# Allegro board pc051b_toplevel_42.brd
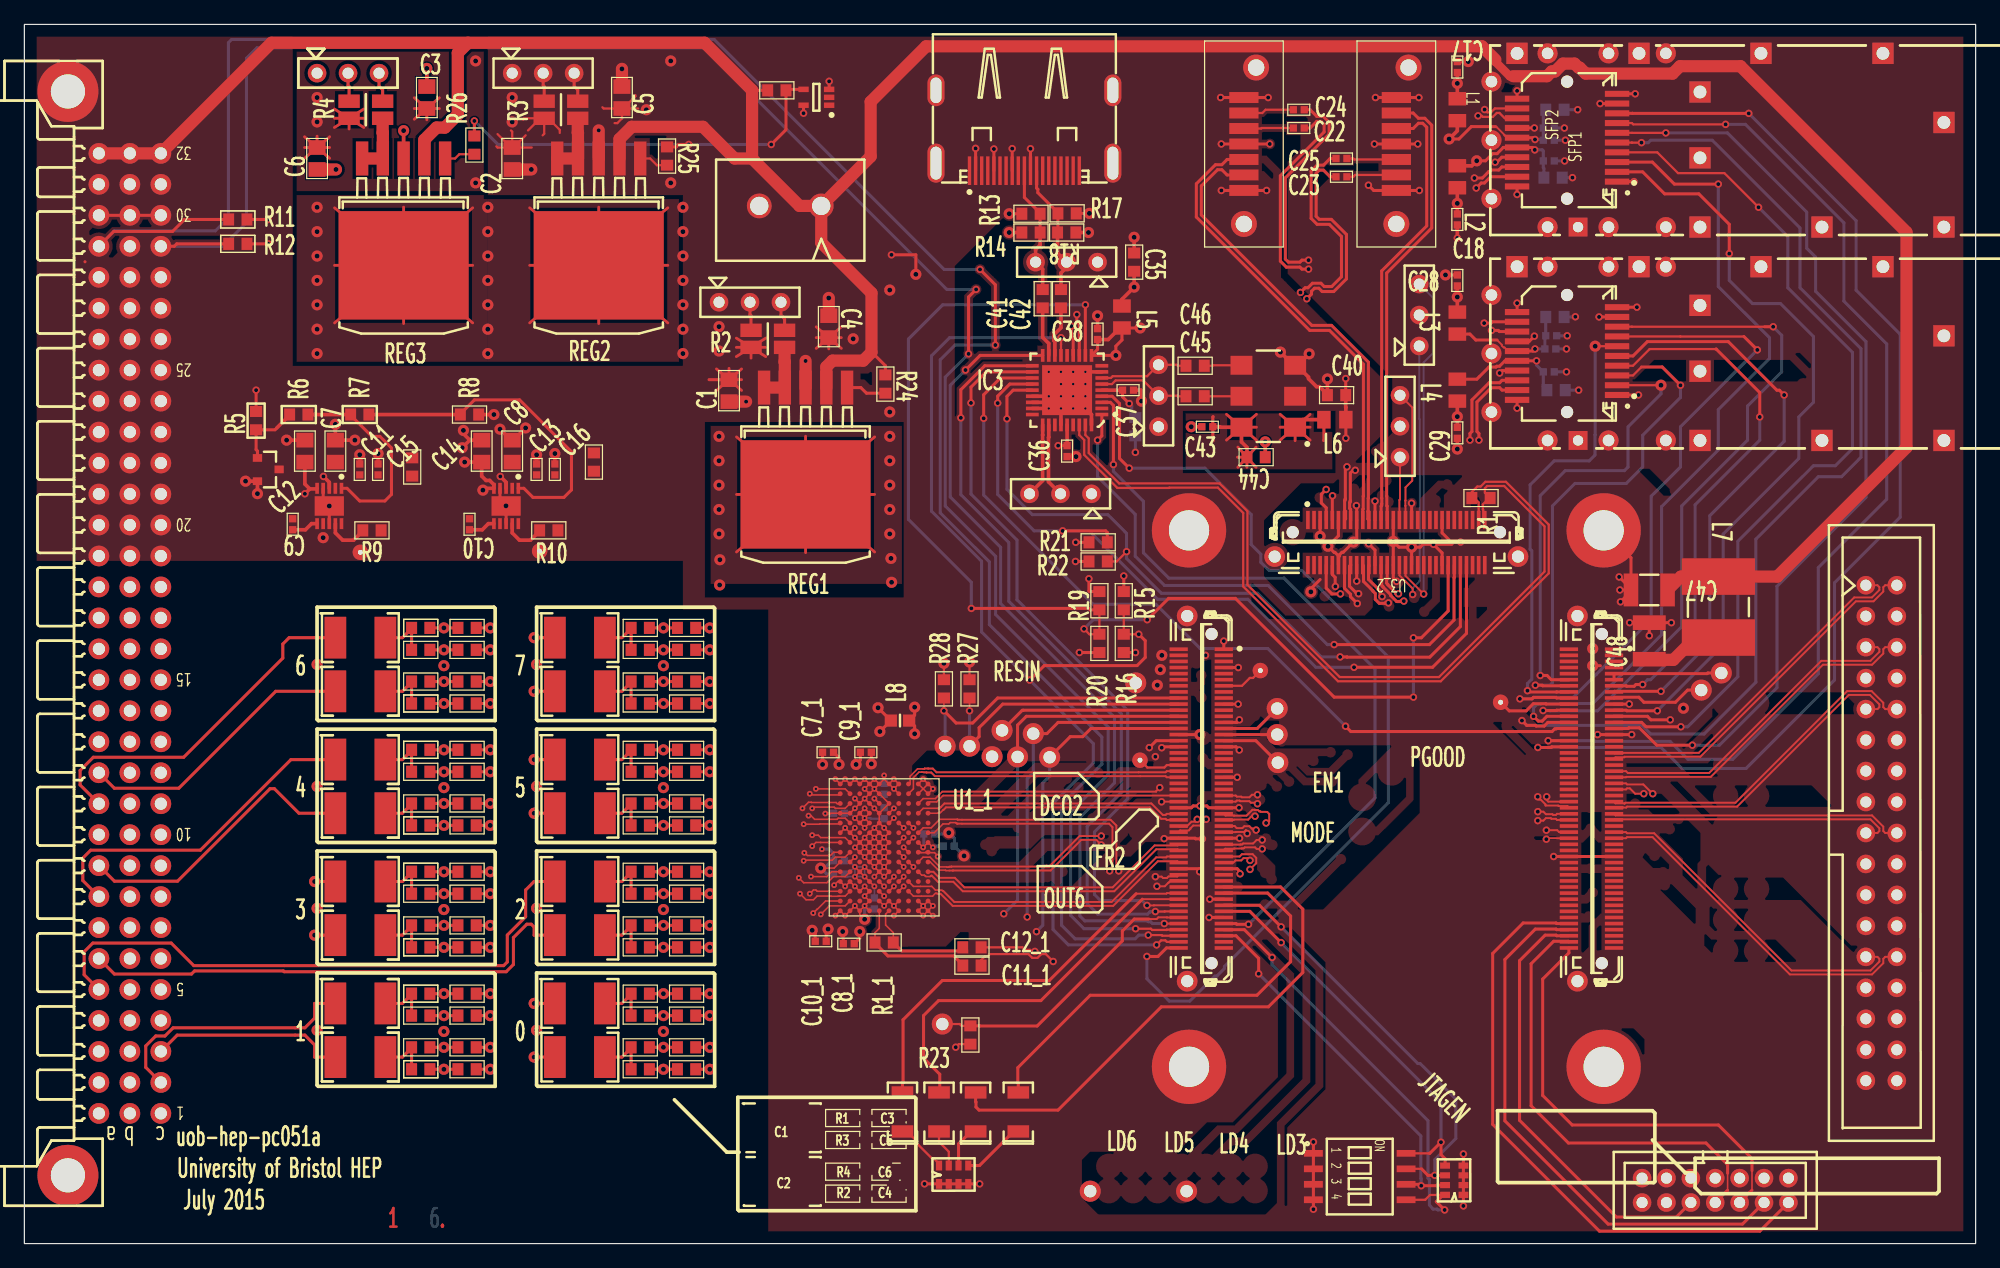
[diagram p0: board, top side]
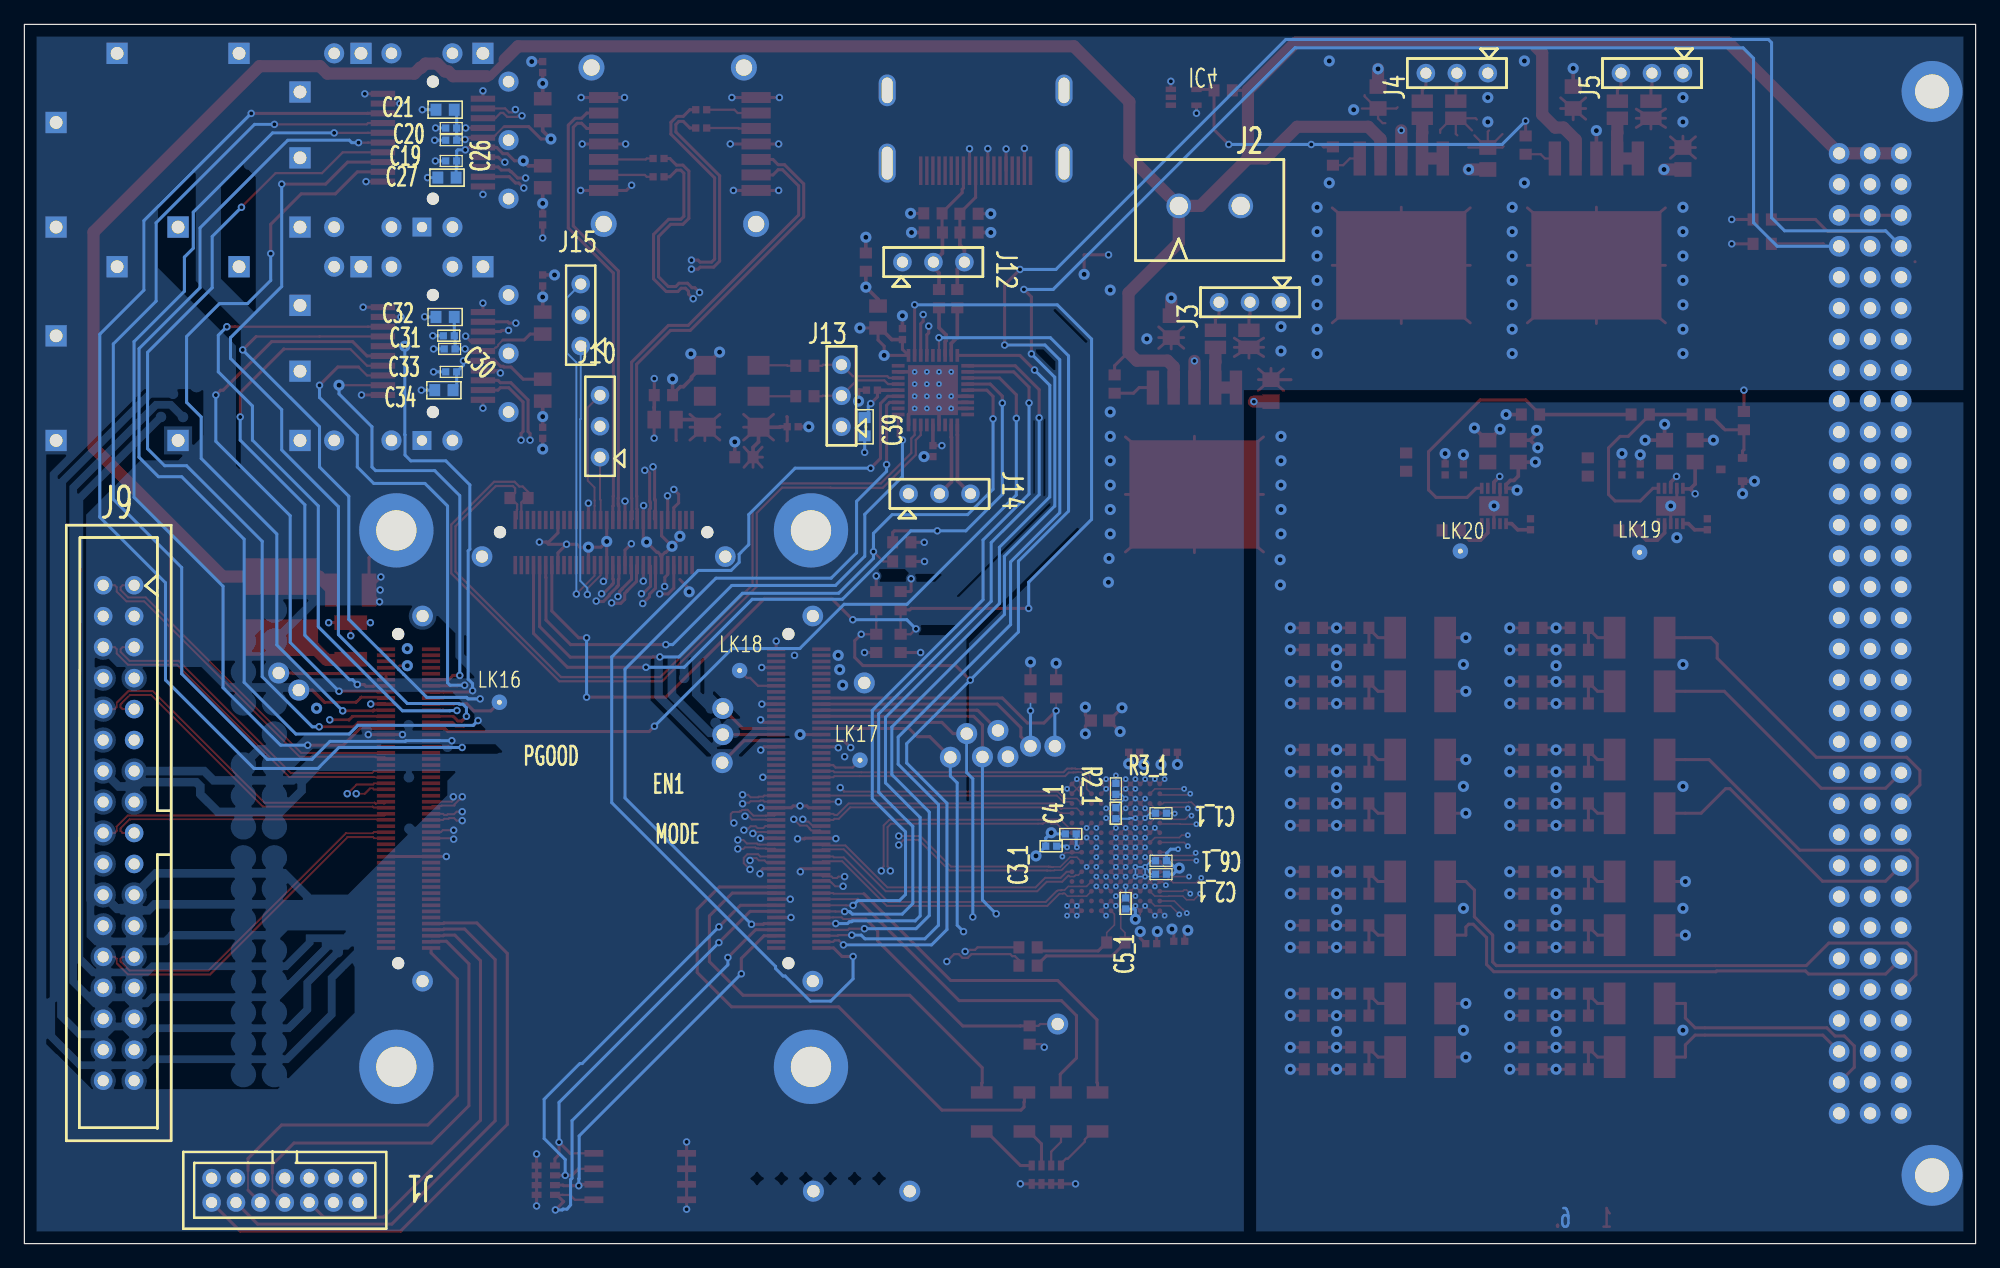
[diagram p1: board, bottom side, seen from below]

Outline 160 x 100 mm; copper layers: TOP, L2, L3, L4, L5, BOTTOM. Coordinates in mm from the lower left corner of the outline.
Outline path: rectangle 0,0 160,100

## Design rules (mm)
net group AIN1>_: nets AIN+<1>_1 AIN-<1>_1
net group AIN2>_: nets AIN+<2>_1 AIN-<2>_1
net group AIN3>_: nets AIN+<3>_1 AIN-<3>_1
net group AIN4>_: nets AIN+<4>_1 AIN-<4>_1
net group AIN5>_: nets AIN+<5>_1 AIN-<5>_1
net group AIN6>_: nets AIN+<6>_1 AIN-<6>_1
net group AIN7>_: nets AIN+<7>_1 AIN-<7>_1
net group AIN8>_: nets AIN+<8>_1 AIN-<8>_1
net group ANA_IN0: nets ANA_IN+<0> ANA_IN-<0>
net group ANA_IN1: nets ANA_IN+<1> ANA_IN-<1>
net group ANA_IN2: nets ANA_IN+<2> ANA_IN-<2>
net group ANA_IN3: nets ANA_IN+<3> ANA_IN-<3>
net group ANA_IN4: nets ANA_IN+<4> ANA_IN-<4>
net group ANA_IN5: nets ANA_IN+<5> ANA_IN-<5>
net group ANA_IN6: nets ANA_IN+<6> ANA_IN-<6>
net group ANA_IN7: nets ANA_IN+<7> ANA_IN-<7>
net group B16: nets B16<1> CLK_40_FROM_FPGA
net group B16_N: nets B16_N<1> CLK_40_FROM_FPGA_N
net group B132: nets B13<2> B13_N<2>
net group B134: nets B13<4> B13_N<4>
net group B151: nets B15<20> B15_N<20>
net group B152: nets B15<2> B15_N<2>
net group B153: nets B15<3> B15_N<3>
net group B155: nets B15<21> B15_N<21>
net group B157: nets B15<7> B15_N<7>
net group B158: nets B15<8> B15_N<8>
net group B159: nets B15<9> B15_N<9>
net group B162: nets B16<2> B16_N<2>
net group B163: nets B16<3> B16_N<3>
net group B164: nets B16<4> B16_N<4>
net group B165: nets B16<5> B16_N<5>
net group B166: nets B16<6> B16_N<6>
net group B167: nets B16<7> B16_N<7>
net group B168: nets B16<8> B16_N<8>
net group B169: nets B16<9> B16_N<9>
net group B1314: nets B13<17> B13_N<17>
net group B1317: nets B13<14> B13_N<14>
net group B1510: nets B15<10> B15_N<10>
net group B1511: nets B15<11> B15_N<11>
net group B1512: nets B15<12> B15_N<12>
net group B1513: nets B15<13> B15_N<13>
net group B1514: nets B15<14> B15_N<14>
net group B1516: nets B15<18> B15_N<18>
net group B1517: nets B15<17> B15_N<17>
net group B1518: nets B15<16> B15_N<16>
net group B1519: nets B15<19> B15_N<19>
net group B1520: nets B15<1> B15_N<1>
net group B1522: nets B15<22> B15_N<22>
net group B1523: nets B15<23> B15_N<23>
net group B1524: nets B15<24> B15_N<24>
net group B1610: nets B16<10> B16_N<10>
net group B1611: nets B16<11> B16_N<11>
net group B1612: nets B16<12> B16_N<12>
net group B1613: nets B16<13> B16_N<13>
net group B1614: nets B16<14> B16_N<14>
net group B1615: nets B16<15> B16_N<15>
net group B1616: nets B16<16> B16_N<16>
net group B1617: nets B16<17> B16_N<17>
net group B1618: nets B16<18> B16_N<18>
net group B1619: nets B16<19> B16_N<19>
net group B1620: nets B16<20> B16_N<20>
net group B1621: nets B16<21> B16_N<21>
net group B1623: nets B16<23> B16_N<23>
net group B1624: nets B16<24> B16_N<24>
net group CLK: nets CLK+_1 CLK-_1
net group CLK40_IN: nets CLK40_IN CLK40_IN_N
net group CLK_40_FPGA: nets CLK_40_FPGA CLK_40_FPGA_N
net group CLKIN: nets CLK40_ADC0 CLK40_ADC0_N
net group MGT_RX0: nets MGT_RX<0> MGT_RX_N<0>
net group MGT_RX1: nets MGT_RX<1> MGT_RX_N<1>
net group MGT_RX2: nets MGT_RX<2> MGT_RX_N<2>
net group MGT_RX3: nets MGT_RX<3> MGT_RX_N<3>
net group MGT_TX0: nets MGT_TX<0> MGT_TX_N<0>
net group MGT_TX1: nets MGT_TX<1> MGT_TX_N<1>
net group MGT_TX2: nets MGT_TX<2> MGT_TX_N<2>
net group MGT_TX3: nets MGT_TX<3> MGT_TX_N<3>
net group B13: nets ADC_CSB ADC_SDI ADC_SDOB B13<1> B13<5> B13<6> B13<10> B13<13> B13<15> B13<16>
net group B13_N: nets ADC_CSA ADC_SCK ADC_SDOA B13_N<1> B13_N<5> B13_N<6> B13_N<10> B13_N<13> B13_N<15> B13_N<16>
net group B14: nets B14<15> CLK40_CLK1_VALID_N CLK40_I2C_SDA CLK40_LOL CLK40_PHASE_DEC CLK40_RATE0 EXTERNAL_SDA SFP0_MOD_DEF1 SFP0_MOD_DEF2 SFP0_RATE_SELECT SFP0_TX_FAULT SFP1_LOS SFP1_MOD_DEF1 SFP1_RATE_SELECT SFP1_TX_DISABLE
net group B14_N: nets B14_N<12> B14_N<15> CLK40_CLK2_VALID_N CLK40_CLK_SEL CLK40_I2C_SCL CLK40_PHASE_INC CLK40_RATE1 CLK40_RST_N EXTERNAL_SCL SFP0_LOS SFP0_MOD_DEF0 SFP0_TX_DISABLE SFP1_MOD_DEF0 SFP1_MOD_DEF2 SFP1_TX_FAULT
net group B15: nets B15<15> BUSY_OUT SYNC_IN TRIG_IN
net group B15_N: nets B15_N<15> BUSY_OUT_N SYNC_IN_N TRIG_IN_N

## Placement (name value [footprint] x y rotation side)
C1  22uF  [C0805]  57.78 69.96 90 top
C1_1  100nF  [C0402]  66.8 35.3 0 bottom
C1_1_1  -  [S45X32]  43.5 49.7 0 top
C1_2_1  -  [S45X32]  43.5 19.7 0 top
C1_3_1  -  [S45X32]  25.5 19.7 0 top
C1_4_1  -  [S45X32]  43.5 29.7 0 top
C1_5_1  -  [S45X32]  25.5 29.7 0 top
C1_6_1  -  [S45X32]  25.5 39.7 0 top
C1_7_1  -  [S45X32]  43.5 39.7 0 top
C1_8_1  -  [S45X32]  25.5 49.7 0 top
C2  22uF  [C0805]  40 89 90 top
C2_1  100nF  [C0402]  66.8 30.3 0 bottom
C2_1_1  -  [S45X32]  43.5 45.3 0 top
C2_2_1  -  [S45X32]  43.5 15.3 0 top
C2_3_1  -  [S45X32]  25.5 15.3 0 top
C2_4_1  -  [S45X32]  43.5 25.3 0 top
C2_5_1  -  [S45X32]  25.5 25.3 0 top
C2_6_1  -  [S45X32]  25.5 35.3 0 top
C2_7_1  -  [S45X32]  43.5 35.3 0 top
C2_8_1  -  [S45X32]  25.5 45.3 0 top
C3  22uF  [C0805]  33 94 270 top
C3_1  100nF  [C0402]  75.8 32.6 180 bottom
C3_1_1  100nF  [C0603]  54.3 50.5 180 top
C3_2_1  100nF  [C0603]  54.3 20.5 180 top
C3_3_1  100nF  [C0603]  36.3 20.5 180 top
C3_4_1  100nF  [C0603]  54.3 30.5 180 top
C3_5_1  100nF  [C0603]  36.3 30.5 180 top
C3_6_1  100nF  [C0603]  36.3 40.5 180 top
C3_7_1  100nF  [C0603]  54.3 40.5 180 top
C3_8_1  100nF  [C0603]  36.3 50.5 180 top
C4  22uF  [C0805]  65.96 75.21 270 top
C4_1  100nF  [C0402]  74.2 33.6 180 bottom
C4_1_1  100nF  [C0603]  54.3 44.3 180 top
C4_2_1  100nF  [C0603]  54.3 14.3 180 top
C4_3_1  100nF  [C0603]  36.3 14.3 180 top
C4_4_1  100nF  [C0603]  54.3 24.3 180 top
C4_5_1  100nF  [C0603]  36.3 24.3 180 top
C4_6_1  100nF  [C0603]  36.3 34.3 180 top
C4_7_1  100nF  [C0603]  54.3 34.3 180 top
C4_8_1  100nF  [C0603]  36.3 44.3 180 top
C5  22uF  [C0805]  49 94 270 top
C5_1  100nF  [C0402]  69.7 27.9 90 bottom
C5_1_1  180pF  [C0603]  54.3 48.7 180 top
C5_2_1  180pF  [C0603]  54.3 18.7 180 top
C5_3_1  180pF  [C0603]  36.3 18.7 180 top
C5_4_1  180pF  [C0603]  54.3 28.7 180 top
C5_5_1  180pF  [C0603]  36.3 28.7 180 top
C5_6_1  180pF  [C0603]  36.3 38.7 180 top
C5_7_1  180pF  [C0603]  54.3 38.7 180 top
C5_8_1  180pF  [C0603]  36.3 48.7 180 top
C6  22uF  [C0805]  24 89 90 top
C6_1  100nF  [C0402]  66.8 31.4 0 bottom
C6_1_1  180pF  [C0603]  54.3 46.1 180 top
C6_2_1  180pF  [C0603]  54.3 16.1 180 top
C6_3_1  180pF  [C0603]  36.3 16.1 180 top
C6_4_1  180pF  [C0603]  54.3 26.1 180 top
C6_5_1  180pF  [C0603]  36.3 26.1 180 top
C6_6_1  180pF  [C0603]  36.3 36.1 180 top
C6_7_1  180pF  [C0603]  54.3 36.1 180 top
C6_8_1  180pF  [C0603]  36.3 46.1 180 top
C7  22uF  [C0805]  25.5 65 270 top
C7_1  100nF  [C0402]  65.9 40.3 0 top
C8  22uF  [C0805]  40 65 270 top
C8_1  100nF  [C0402]  67.6 24.6 0 top
C9  100nF  [C0402]  22 59 270 top
C9_1  100nF  [C0402]  69 40.3 0 top
C10  100nF  [C0402]  36.5 59 270 top
C10_1  100nF  [C0402]  65.3 24.8 0 top
C11  100nF  [C0402]  27.5 63.5 270 top
C11_1  100nF  [C0603]  77.7 22.8 180 top
C12  22uF  [C0805]  23 65 270 top
C12_1  100nF  [C0603]  77.7 24.3 180 top
C13  100nF  [C0402]  42 63.5 270 top
C14  22uF  [C0805]  37.5 65 270 top
C15  1uF  [C0402]  29 63.5 270 top
C16  1uF  [C0402]  43.5 63.5 270 top
C17  1uF  [C0402]  117.5 96.5 270 top
C18  1uF  [C0402]  117.5 84 90 top
C19  100nF  [C0402]  125 90.5 180 bottom
C20  1uF  [C0402]  125 91.5 180 bottom
C21  22uF  [C0603]  125.5 93 180 bottom
C22  100nF  [C0402]  104.5 91.5 0 top
C23  100nF  [C0402]  108 87.5 180 top
C24  100nF  [C0402]  104.5 93 0 top
C25  100nF  [C0402]  108 89 180 top
C26  100nF  [C0402]  125 88.8 180 bottom
C27  22uF  [C0603]  125.35 87.43 180 bottom
C28  1uF  [C0402]  117.5 79 270 top
C29  1uF  [C0402]  117.5 66.5 90 top
C30  100nF  [C0402]  125.13 73.38 180 bottom
C31  1uF  [C0402]  125.2 74.46 180 bottom
C32  22uF  [C0603]  125.5 76 180 bottom
C33  100nF  [C0402]  125 71.5 180 bottom
C34  22uF  [C0603]  125.6 70 180 bottom
C35  10uF  [C0603]  91 80.5 270 top
C36  100nF  [C0402]  85.5 65 90 top
C37  100nF  [C0402]  90.5 70 180 top
C38  100nF  [C0402]  88 74.6 270 top
C39  10uF  [C0603]  91.1 67 90 bottom
C40  10uF  [C0603]  107.6 69.59 0 top
C41  100nF  [C0603]  83.5 77.5 90 top
C42  100nF  [C0603]  85 77.5 90 top
C43  100nF  [C0402]  97 67 0 top
C44  10uF  [C0603]  101 64.5 180 top
C45  100nF  [C0603]  96 69.5 0 top
C46  100nF  [C0603]  96 72 0 top
C47  10uF  [C1210]  133.24 53.61 180 top
C48  10uF  [C1210]  133.24 49.43 90 top
IC1  -  [SON50P300X300X100-11N-R240X160]  25 60.5 270 top
IC2  -  [SON50P300X300X100-11N-R240X160]  39.5 60.5 270 top
IC3  -  [QFN50P600X600X90-37N-S410]  85.5 70 180 top
IC4  -  [SOT65P210X110-5N]  64.94 94.02 180 top
J1  -  [CON14MD_2MM]  144.65 5.37 270 top
J2  -  [COND2M_508]  65.34 85.11 270 top
J3  -  [CONHE13D3X1M]  56.96 77.21 0 top
J4  -  [CONHE13D3X1M]  40 96 0 top
J5  -  [CONHE13D3X1M]  24 96 0 top
J6  -  [HARTING_0903196X921]  6.11 10.68 180 top
J7  -  [TYCO_1367073]  126.5 90.5 180 top
J8  -  [TYCO_1367073]  126.5 73 180 top
J9  -  [CON34MD_3M2500]  151 54 270 top
J10  -  [CONHE13D3X1M]  112.8 64.5 90 top
J11  -  [SAMTEC_HDMI-19-01-X-SM]  82 88 180 top
J12  -  [CONHE13D3X1M]  88 80.5 180 top
J13  -  [CONHE13D3X1M]  93 67 90 top
J14  -  [CONHE13D3X1M]  87.5 61.5 180 top
J15  -  [CONHE13D3X1M]  114.38 73.62 90 top
JB1  -  [SAMTEC_LSHM-150-04-0-L-DV-A-S]  96.45 36.5 90 top
JB2  -  [SAMTEC_LSHM-150-04-0-L-DV-A-S]  128.45 36.5 90 top
JB3  -  [SAMTEC_LSHM-130-04-0-L-DV-A-S]  112.5 57.45 180 top
L1  -  [INDC2012X90N]  117.5 93 270 top
L2  -  [INDC2012X90N]  117.5 87.5 270 top
L3  -  [INDC2012X90N]  117.5 75.5 270 top
L4  -  [INDC2012X90N]  117.5 70 270 top
L5  -  [INDC2012X90N]  90 76 270 top
L6  -  [INDC2012X90N]  107.46 67.58 180 top
L7  -  [INDC_WURTH_7427511]  138.91 52.21 90 top
L8  330R@100MHz  [INDC1608X95N]  71.8 42.9 0 top
L9  -  [C0603]  31.8 63.7 90 top
L10  -  [C0603]  46.7 64.1 90 top
LD3  Red  [D1206]  81.5 12.4 270 top
LD4  Green  [D1206]  78 12.4 270 top
LD5  Yellow  [D1206]  75 12.4 270 top
LD6  Red  [D1206]  72 12.4 270 top
LK1  -  [1-HOLE_1-0P]  102.73 41.75 0 top
LK1_2  -  [FXG_M3]  129.5 14.5 90 top
LK2  -  [1-HOLE_1-0P]  102.73 43.89 0 top
LK2_2  -  [FXG_M3]  129.5 58.5 90 top
LK3  -  [1-HOLE_1-0P]  75.27 18.01 0 top
LK3_2  -  [FXG_M3]  95.5 14.5 90 top
LK4  -  [1-HOLE_1-0P]  102.78 39.45 0 top
LK4_2  -  [FXG_M3]  95.5 58.5 90 top
LK5  -  [1-HOLE_1-0P]  91.13 45.99 0 top
LK6  -  [1-HOLE_1-0P]  137.5 45.4 0 top
LK7  -  [1-HOLE_1-0P]  87.4 4.3 0 top
LK8  -  [1-HOLE_1-0P]  95.3 4.3 0 top
LK9  -  [1-HOLE_1-0P]  139.15 46.8 0 top
LK16  -  [1-HOLE_0-4P]  121.05 44.4 0 top
LK17  -  [1-HOLE_0-4P]  91.48 39.65 0 top
LK18  -  [1-HOLE_0-4P]  101.35 47 0 top
LK19  -  [1-HOLE_0-4P]  27.55 56.7 0 top
LK20  -  [1-HOLE_0-4P]  42.25 56.8 0 top
LK21  -  [1-HOLE_1-0P]  75.5 40.8 0 top
LK22  -  [1-HOLE_1-0P]  81.44 39.92 0 top
LK23  -  [1-HOLE_1-0P]  84.07 39.89 0 top
LK24  -  [1-HOLE_1-0P]  77.5 40.8 0 top
LK25  -  [1-HOLE_1-0P]  80.17 42.09 0 top
LK26  -  [1-HOLE_1-0P]  82.73 41.83 0 top
LK27  -  [1-HOLE_1-0P]  79.35 39.94 0 top
NOREF  -  []  66 26.88 90 top
NOREF#2  -  []  -50.7 -54.1 0 top
NOREF#3  -  []  0 0 90 top
NOREF#4  -  []  66 26.88 90 top
NOREF#5  -  []  74.1 36.9 90 top
NOREF#6  -  []  66 38.12 0 top
NOREF#7  -  []  0 100 0 top
NOREF#8  -  []  66 38.12 0 top
NOREF#9  -  []  74.1 36.9 90 top
QZ1  125MHz  [OSCSC254P520X750X140-6N]  102 69.5 180 top
R1  100  [C0603]  119.44 61.15 180 top
R1_1  100  [C0603]  70.5 24.7 180 top
R1_1_1  51  [C0603]  50.5 50.5 180 top
R1_2_1  51  [C0603]  50.5 20.5 180 top
R1_3_1  51  [C0603]  32.5 20.5 180 top
R1_4_1  51  [C0603]  50.5 30.5 180 top
R1_5_1  51  [C0603]  32.5 30.5 180 top
R1_6_1  51  [C0603]  32.5 40.5 180 top
R1_7_1  51  [C0603]  50.5 40.5 180 top
R1_8_1  51  [C0603]  32.5 50.5 180 top
R2  0.05  [RES_LVK12]  60.96 74.21 180 top
R2_1  0R0  [C0402]  70.5 35.3 270 bottom
R2_1_1  51  [C0603]  50.5 44.3 180 top
R2_2_1  51  [C0603]  50.5 14.3 180 top
R2_3_1  51  [C0603]  32.5 14.3 180 top
R2_4_1  51  [C0603]  50.5 24.3 180 top
R2_5_1  51  [C0603]  32.5 24.3 180 top
R2_6_1  51  [C0603]  32.5 34.3 180 top
R2_7_1  51  [C0603]  50.5 34.3 180 top
R2_8_1  51  [C0603]  32.5 44.3 180 top
R3  0.05  [RES_LVK12]  44 93 180 top
R3_1  XX  [C0402]  70.5 37.3 270 bottom
R3_1_1  100  [C0603]  50.5 48.7 0 top
R3_2_1  100  [C0603]  50.5 18.7 0 top
R3_3_1  100  [C0603]  32.5 18.7 0 top
R3_4_1  100  [C0603]  50.5 28.7 0 top
R3_5_1  100  [C0603]  32.5 28.7 0 top
R3_6_1  100  [C0603]  32.5 38.7 0 top
R3_7_1  100  [C0603]  50.5 38.7 0 top
R3_8_1  100  [C0603]  32.5 48.7 0 top
R4  0.05  [RES_LVK12]  28 93 180 top
R4_1_1  100  [C0603]  50.5 46.1 0 top
R4_2_1  100  [C0603]  50.5 16.1 0 top
R4_3_1  100  [C0603]  32.5 16.1 0 top
R4_4_1  100  [C0603]  50.5 26.1 0 top
R4_5_1  100  [C0603]  32.5 26.1 0 top
R4_6_1  100  [C0603]  32.5 36.1 0 top
R4_7_1  100  [C0603]  50.5 36.1 0 top
R4_8_1  100  [C0603]  32.5 46.1 0 top
R5  220  [C0603]  19 67.5 90 top
R6  68  [C0603]  22.5 68 180 top
R7  390  [C0603]  27.5 68 180 top
R8  510  [C0603]  36.5 68 180 top
R9  150  [C0603]  28.5 58.5 0 top
R10  150  [C0603]  43 58.5 0 top
R11  1k  [C0603]  17.5 84 0 top
R12  1k  [C0603]  17.5 82 0 top
R13  130  [C0603]  82.54 84.47 180 top
R14  82  [C0603]  82.54 82.93 0 top
R15  1k  [C0603]  90.15 52.73 90 top
R16  1k  [C0603]  90.15 49.23 90 top
R17  130  [C0603]  85.5 84.5 0 top
R18  82  [C0603]  85.47 82.93 180 top
R19  1k  [C0603]  88.15 52.73 90 top
R20  1k  [C0603]  88.15 49.23 90 top
R21  1k  [C0603]  88.05 57.52 180 top
R22  1k  [C0603]  88.05 55.95 180 top
R23  1k  [C0603]  77.57 17.11 270 top
R24  00  [C0603]  70.6 70.5 270 top
R25  00  [C0603]  52.7 89.2 270 top
R26  00  [C0603]  36.9 90.1 270 top
R27  1k  [C0603]  77.5 45.5 90 top
R28  1k  [C0603]  75.4 45.5 90 top
R29  1k  [C0603]  61.7 94.59 180 top
REG1  -  [DDPAK_5]  67.46 70.21 180 top
REG2  -  [DDPAK_5]  50.5 89 180 top
REG3  -  [DDPAK_5]  34.5 89 180 top
RZ1  33  [ARC241_SO8]  75 4.9 0 top
RZ2  4.7k  [ARC241_SO8]  118 4 90 top
SFP1  -  [TYCO_6367034-1]  126.5 90.5 180 top
SFP2  -  [TYCO_6367035-1]  126.5 90.5 180 top
SFP3  -  [TYCO_6367034-1]  126.5 73 180 top
SFP4  -  [TYCO_6367035-1]  126.5 73 180 top
SW1  -  [SW_TYCO_1571983-4]  109.5 5.5 0 top
U1  -  [SK_SATA_SMD_STR]  100 94 0 top
U1_1  -  [BGA140_11-25MMX9-00MMX2MM]  70.5 32.5 0 top
U2  -  [SK_SATA_SMD_STR]  112.5 94 0 top
Z1  -  [SOT23]  20 63.5 0 top

## Library data of the parts
C1-C8 C12 C14 = CAPCERSMDCL2: part number: CAPCERSMDCL2_0805-22UF_X7R,10V_GEN; tolerance: 10%
C1_1 C2_1 C3_1 C4_1 C5_1 C6_1 C7_1 C8_1 C9 C9_1 C10 C10_1 C11 C13 C19 C22-C26 C30 C33 C36-C38 C43 = CAPCERSMDCL2: part number: CAPCERSMDCL2_0402-100NF,16V_GEN; tolerance: 10%
C1_1_1 C1_2_1 C1_3_1 C1_4_1 C1_5_1 C1_6_1 C1_7_1 C1_8_1 C2_1_1 C2_2_1 C2_3_1 C2_4_1 C2_5_1 C2_6_1 C2_7_1 C2_8_1 = CAPCERSMDCL1: part number: CAPCERSMDCL1_1812-470NF,50V
C3_1_1 C3_2_1 C3_3_1 C3_4_1 C3_5_1 C3_6_1 C3_7_1 C3_8_1 C4_1_1 C4_2_1 C4_3_1 C4_4_1 C4_5_1 C4_6_1 C4_7_1 C4_8_1 C11_1 C12_1 C41 C42 C45 C46 = CAPCERSMDCL2: part number: CAPCERSMDCL2_0603-100NF,16V; tolerance: 10%
C5_1_1 C5_2_1 C5_3_1 C5_4_1 C5_5_1 C5_6_1 C5_7_1 C5_8_1 C6_1_1 C6_2_1 C6_3_1 C6_4_1 C6_5_1 C6_6_1 C6_7_1 C6_8_1 = CAPCERSMDCL1: part number: CAPCERSMDCL1_0603-180PF,50V; tolerance: 5%
C15-C18 C20 C28 C29 C31 = CAPCERSMDCL2: part number: CAPCERSMDCL2_0402-1UF,16V; tolerance: 10%
C21 C27 C32 C34 = CAPCERSMDCL2: part number: CAPCERSMDCL2_0603-22UF,4V; tolerance: 20%
C35 C39 C40 C44 = CAPCERSMDCL2: part number: CAPCERSMDCL2_0603-10UF,6.3V; tolerance: 20%
C47 C48 = CAPCERSMDCL2: part number: CAPCERSMDCL2_1210-10UF,25V; tolerance: 10%
IC1 IC2 = TPS51200: part number: TPS5200DRCT
IC3 = SI5326: part number: SI5326A-C-GM
IC4 = 74LVC1G07: part number: SN74LVC1G07DCK
J1 = CON14P: part number: CON14P-MOLEX_87831
J2 = CON2P: part number: CON2P-MSTBVA2.5-2
J3-J5 J10 J12-J15 = CON3P: part number: CON3P-SIL254D
J6 = CONABC96: part number: CONABC96-09 03 196 6921
J7 J8 = CON20P_SFP: part number: CON20P_SFP-1367073-1
J9 = CON34P: part number: CON34P-3M_2534_60
J11 = CON19P: part number: CON19P-HDMI-19-01-X-SM
JB1 = TRENZ_TE0712_JB1
JB2 = TRENZ_TE0712_JB2
JB3 = TRENZ_TE0712_JB3
L1-L6 = FERRITE: part number: FERRITE_C0805-LI0805H121R-10,LI0805H121R-10
L7 = FERRITE: part number: FERRITE_SMD-7427511,WURTH
L8 = FERRITE: part number: FERRITE_SMD-MPZ1608S331A,TDK
L9 L10 = FERRITE: part number: FERRITE_SMD-10Z,ILBB_0603
LD3 LD6 = LED: part number: LED-HSMH-C150
LD4 = LED: part number: LED-HSMY-C150
LD5 = LED: part number: LED-HSMG-C150
LK1-LK9 LK21-LK27 = 1-HOLE: part number: 1-HOLE_1-0-BASE
LK1_2 LK2_2 LK3_2 LK4_2 = 1-HOLE: part number: 1-HOLE_M3-BASE
LK16-LK20 = 1-HOLE: part number: 1-HOLE_0-4-BASE
QZ1 = OSC_6P_ENDIS_OUTP_OUTN: part number: FXO-LC725-125
R1 R1_1 R3_1_1 R3_2_1 R3_3_1 R3_4_1 R3_5_1 R3_6_1 R3_7_1 R3_8_1 R4_1_1 R4_2_1 R4_3_1 R4_4_1 R4_5_1 R4_6_1 R4_7_1 R4_8_1 = RSMD0603: part number: RSMD0603_1/10W-100,1%; tolerance: 1%
R1_1_1 R1_2_1 R1_3_1 R1_4_1 R1_5_1 R1_6_1 R1_7_1 R1_8_1 R2_1_1 R2_2_1 R2_3_1 R2_4_1 R2_5_1 R2_6_1 R2_7_1 R2_8_1 = RSMD0603: part number: RSMD0603_1/10W-51,1%; tolerance: 1%
R2-R4 = RES_SR: part number: RES_SR_LVK12-0.05,1%
R2_1 = RSMD0402: part number: RSMD0402_1/16W-0R0,1%; tolerance: 1%
R3_1 = RSMD0402: part number: RSMD0402_0.0625W-XX,1%; tolerance: 1%
R5 = RSMD0603: part number: RSMD0603_1/10W-220,1%; tolerance: 1%
R6 = RSMD0603: part number: RSMD0603_1/10W-68,1%; tolerance: 1%
R7 = RSMD0603: part number: RSMD0603_1/10W-390,1%; tolerance: 1%
R8 = RSMD0603: part number: RSMD0603_1/10W-510,1%; tolerance: 1%
R9 R10 = RSMD0603: part number: RSMD0603_1/10W-150,1%; tolerance: 1%
R11 R12 R15 R16 R19-R23 R27-R29 = RSMD0603: part number: RSMD0603_1/10W-1K,1%; tolerance: 1%
R13 R17 = RSMD0603: part number: RSMD0603_1/10W-130,1%; tolerance: 1%
R14 R18 = RSMD0603: part number: RSMD0603_1/10W-82,1%; tolerance: 1%
R24-R26 = RSMD0603: part number: RSMD0603_-00,
REG1 = LT1963EQ: part number: LT1963EQ-3.3V
REG2 = LT1963EQ: part number: LT1963EQ-2.5V
REG3 = LT1963EQ: part number: LT1963EQ-1.8V
RZ1 = R4ISMD: part number: R4ISMD_1206-33
RZ2 = R4ISMD: part number: R4ISMD_1206-4.7K
SFP1 SFP3 = SFP_CAGE: part number: SFP_CAGE-6367034-1
SFP2 SFP4 = SFP_CAGE: part number: SFP_CAGE-6367035-1
SW1 = SW4INT: part number: SW4INT-1571983-4
U1 U2 = SK_SATA: part number: SK_SATA_SMD_STR-MOLEX
U1_1 = LTM9007_CY: part number: LTM9007_CY_BGA-LINEAR
Z1 = LM4041_1V2

## Footprints (pads in the part's own frame, mm; a bottom-side part is the same pattern mirrored in y, then rotated)
1-HOLE_0-4P
  round 1.27 hole 0.406: 1(0,0)
1-HOLE_1-0P
  round 1.727 hole 1.016: 1(0,0)
ARC241_SO8
  rect 0.508x0.813 smd: 1(0,0) 2(0.8,0) 3(1.6,0) 4(2.4,0) 5(2.4,1.505) 6(1.6,1.505) 7(0.8,1.505) 8(0,1.505)
BGA140_11-25MMX9-00MMX2MM
  round 0.4 smd: A1(-3.6,5.2) A2(-2.8,5.2) A3(-2,5.2) A4(-1.2,5.2) A5(-0.4,5.2) A6(0.4,5.2) A7(1.2,5.2) A8(2,5.2) A9(2.8,5.2) A10(3.6,5.2) B1(-3.6,4.4) B2(-2.8,4.4) B3(-2,4.4) B4(-1.2,4.4) B5(-0.4,4.4) B6(0.4,4.4) B7(1.2,4.4) B8(2,4.4) B9(2.8,4.4) B10(3.6,4.4) C1(-3.6,3.6) C2(-2.8,3.6) C3(-2,3.6) C4(-1.2,3.6) C5(-0.4,3.6) C6(0.4,3.6) C7(1.2,3.6) C8(2,3.6) C9(2.8,3.6) C10(3.6,3.6) D1(-3.6,2.8) D2(-2.8,2.8) D3(-2,2.8) D4(-1.2,2.8) D5(-0.4,2.8) D6(0.4,2.8) D7(1.2,2.8) D8(2,2.8) D9(2.8,2.8) D10(3.6,2.8) E1(-3.6,2) E2(-2.8,2) E3(-2,2) E4(-1.2,2) E5(-0.4,2) E6(0.4,2) E7(1.2,2) E8(2,2) E9(2.8,2) E10(3.6,2) F1(-3.6,1.2) F2(-2.8,1.2) F3(-2,1.2) F4(-1.2,1.2) F5(-0.4,1.2) F6(0.4,1.2) F7(1.2,1.2) F8(2,1.2) F9(2.8,1.2) F10(3.6,1.2) G1(-3.6,0.4) G2(-2.8,0.4) G3(-2,0.4) G4(-1.2,0.4) G5(-0.4,0.4) G6(0.4,0.4) G7(1.2,0.4) G8(2,0.4) G9(2.8,0.4) G10(3.6,0.4) H1(-3.6,-0.4) H2(-2.8,-0.4) H3(-2,-0.4) H4(-1.2,-0.4) H5(-0.4,-0.4) H6(0.4,-0.4) H7(1.2,-0.4) H8(2,-0.4) H9(2.8,-0.4) H10(3.6,-0.4) J1(-3.6,-1.2) J2(-2.8,-1.2) J3(-2,-1.2) J4(-1.2,-1.2) J5(-0.4,-1.2) J6(0.4,-1.2) J7(1.2,-1.2) J8(2,-1.2) J9(2.8,-1.2) J10(3.6,-1.2) K1(-3.6,-2) K2(-2.8,-2) K3(-2,-2) K4(-1.2,-2) K5(-0.4,-2) K6(0.4,-2) K7(1.2,-2) K8(2,-2) K9(2.8,-2) K10(3.6,-2) L1(-3.6,-2.8) L2(-2.8,-2.8) L3(-2,-2.8) L4(-1.2,-2.8) L5(-0.4,-2.8) L6(0.4,-2.8) L7(1.2,-2.8) L8(2,-2.8) L9(2.8,-2.8) L10(3.6,-2.8) M1(-3.6,-3.6) M2(-2.8,-3.6) M3(-2,-3.6) M4(-1.2,-3.6) M5(-0.4,-3.6) M6(0.4,-3.6) M7(1.2,-3.6) M8(2,-3.6) M9(2.8,-3.6) M10(3.6,-3.6) N1(-3.6,-4.4) N2(-2.8,-4.4) N3(-2,-4.4) N4(-1.2,-4.4) N5(-0.4,-4.4) N6(0.4,-4.4) N7(1.2,-4.4) N8(2,-4.4) N9(2.8,-4.4) N10(3.6,-4.4) P1(-3.6,-5.2) P2(-2.8,-5.2) P3(-2,-5.2) P4(-1.2,-5.2) P5(-0.4,-5.2) P6(0.4,-5.2) P7(1.2,-5.2) P8(2,-5.2) P9(2.8,-5.2) P10(3.6,-5.2)
C0402
  rect 0.6x0.6 smd: 1(-0.45,0) 2(0.45,0)
C0603
  rect 0.9x1 smd: 1(-0.75,0) 2(0.75,0)
C0805
  rect 1.2x1.4 smd: 1(-0.9,0) 2(0.9,0)
C1210
  rect 1.2x2.7 smd: 1(-1.5,0) 2(1.5,0)
CON14MD_2MM
  round 1.524 hole 0.914: 1(0,0) 2(2,0) 3(0,-2) 4(2,-2) 5(0,-4) 6(2,-4) 7(0,-6) 8(2,-6) 9(0,-8) 10(2,-8) 11(0,-10) 12(2,-10) 13(0,-12) 14(2,-12)
CON34MD_3M2500
  round 1.524 hole 0.914: 1(0,0) 2(0,2.54) 3(2.54,0) 4(2.54,2.54) 5(5.08,0) 6(5.08,2.54) 7(7.62,0) 8(7.62,2.54) 9(10.16,0) 10(10.16,2.54) 11(12.7,0) 12(12.7,2.54) 13(15.24,0) 14(15.24,2.54) 15(17.78,0) 16(17.78,2.54) 17(20.32,0) 18(20.32,2.54) 19(22.86,0) 20(22.86,2.54) 21(25.4,0) 22(25.4,2.54) 23(27.94,0) 24(27.94,2.54) 25(30.48,0) 26(30.48,2.54) 27(33.02,0) 28(33.02,2.54) 29(35.56,0) 30(35.56,2.54) 31(38.1,0) 32(38.1,2.54) 33(40.64,0) 34(40.64,2.54)
COND2M_508
  round 2.032 hole 1.499: 1(0,0) 2(0,-5.08)
CONHE13D3X1M
  round 1.524 hole 0.914: 1(0,0) 2(2.54,0) 3(5.08,0)
D1206
  rect 1.016x1.778 smd: 1(0,0) 2(3.2,0)
DDPAK_5
  rect 1.016x2.794 smd: 1(0,0) 2(1.702,0) 3(3.404,0) 4(5.105,0) 5(6.807,0)
  rect 10.668x8.89 smd: 6(3.404,8.763)
FXG_M3
  round 6.096 hole 3.302: 1(0,0)
HARTING_0903196X921
  round 5 hole 2.8: 1(2.54,5.08) 2(2.54,-83.82)
  round 1.7 hole 1: A1(0,0) A2(0,-2.54) A3(0,-5.08) A4(0,-7.62) A5(0,-10.16) A6(0,-12.7) A7(0,-15.24) A8(0,-17.78) A9(0,-20.32) A10(0,-22.86) A11(0,-25.4) A12(0,-27.94) A13(0,-30.48) A14(0,-33.02) A15(0,-35.56) A16(0,-38.1) A17(0,-40.64) A18(0,-43.18) A19(0,-45.72) A20(0,-48.26) A21(0,-50.8) A22(0,-53.34) A23(0,-55.88) A24(0,-58.42) A25(0,-60.96) A26(0,-63.5) A27(0,-66.04) A28(0,-68.58) A29(0,-71.12) A30(0,-73.66) A31(0,-76.2) A32(0,-78.74) B1(-2.54,0) B2(-2.54,-2.54) B3(-2.54,-5.08) B4(-2.54,-7.62) B5(-2.54,-10.16) B6(-2.54,-12.7) B7(-2.54,-15.24) B8(-2.54,-17.78) B9(-2.54,-20.32) B10(-2.54,-22.86) B11(-2.54,-25.4) B12(-2.54,-27.94) B13(-2.54,-30.48) B14(-2.54,-33.02) B15(-2.54,-35.56) B16(-2.54,-38.1) B17(-2.54,-40.64) B18(-2.54,-43.18) B19(-2.54,-45.72) B20(-2.54,-48.26) B21(-2.54,-50.8) B22(-2.54,-53.34) B23(-2.54,-55.88) B24(-2.54,-58.42) B25(-2.54,-60.96) B26(-2.54,-63.5) B27(-2.54,-66.04) B28(-2.54,-68.58) B29(-2.54,-71.12) B30(-2.54,-73.66) B31(-2.54,-76.2) B32(-2.54,-78.74) C1(-5.08,0) C2(-5.08,-2.54) C3(-5.08,-5.08) C4(-5.08,-7.62) C5(-5.08,-10.16) C6(-5.08,-12.7) C7(-5.08,-15.24) C8(-5.08,-17.78) C9(-5.08,-20.32) C10(-5.08,-22.86) C11(-5.08,-25.4) C12(-5.08,-27.94) C13(-5.08,-30.48) C14(-5.08,-33.02) C15(-5.08,-35.56) C16(-5.08,-38.1) C17(-5.08,-40.64) C18(-5.08,-43.18) C19(-5.08,-45.72) C20(-5.08,-48.26) C21(-5.08,-50.8) C22(-5.08,-53.34) C23(-5.08,-55.88) C24(-5.08,-58.42) C25(-5.08,-60.96) C26(-5.08,-63.5) C27(-5.08,-66.04) C28(-5.08,-68.58) C29(-5.08,-71.12) C30(-5.08,-73.66) C31(-5.08,-76.2) C32(-5.08,-78.74)
INDC1608X95N
  rect 1x1 smd: 1(-0.75,0) 2(0.75,0)
INDC2012X90N
  rect 1.1x1.45 smd: 1(-0.9,0) 2(0.9,0)
INDC_WURTH_7427511
  rect 3x6 smd: 1(-2.5,0) 2(2.5,0)
OSCSC254P520X750X140-6N
  rect 1.8x1.55 smd: 1(-2.2,2.54) 2(-2.2,0) 3(-2.2,-2.54) 4(2.2,-2.54) 5(2.2,0) 6(2.2,2.54)
QFN50P600X600X90-37N-S410
  rect 1.05x0.3 smd: 1(-2.85,2) 2(-2.85,1.5) 3(-2.85,1) 4(-2.85,0.5) 5(-2.85,0) 6(-2.85,-0.5) 7(-2.85,-1) 8(-2.85,-1.5) 9(-2.85,-2) 19(2.85,-2) 20(2.85,-1.5) 21(2.85,-1) 22(2.85,-0.5) 23(2.85,0) 24(2.85,0.5) 25(2.85,1) 26(2.85,1.5) 27(2.85,2)
  rect 0.3x1.05 smd: 10(-2,-2.85) 11(-1.5,-2.85) 12(-1,-2.85) 13(-0.5,-2.85) 14(0,-2.85) 15(0.5,-2.85) 16(1,-2.85) 17(1.5,-2.85) 18(2,-2.85) 28(2,2.85) 29(1.5,2.85) 30(1,2.85) 31(0.5,2.85) 32(0,2.85) 33(-0.5,2.85) 34(-1,2.85) 35(-1.5,2.85) 36(-2,2.85)
  rect 4.1x4.1 smd: 37(0,0)
RES_LVK12
  rect 1.75x1.1 smd: 1(-1.375,0.7) 2(1.375,0.7) 3(-1.375,-0.7) 4(1.375,-0.7)
S45X32
  rect 1.778x3.429 smd: 1(0,0) 2(4.1,0)
SAMTEC_HDMI-19-01-X-SM
  rect 0.28x2.35 smd: 1(4.5,0) 2(4,0) 3(3.5,0) 4(3,0) 5(2.5,0) 6(2,0) 7(1.5,0) 8(1,0) 9(0.5,0) 10(0,0) 11(-0.5,0) 12(-1,0) 13(-1.5,0) 14(-2,0) 15(-2.5,0) 16(-3,0) 17(-3.5,0) 18(-4,0) 19(-4.5,0)
  oval 1.4x3.2 hole 0.9x2.7: 20(7.25,-0.62) 21(-7.25,-0.62)
  oval 1.4x2.6 hole 0.9x2.1: 22(7.25,-6.59) 23(-7.25,-6.59)
SAMTEC_LSHM-130-04-0-L-DV-A-S
  round 1 hole 1.45 unplated: (-8.5,-0.9) (8.5,-0.9)
  rect 0.3x1.5 smd: 1(7.25,-1.9) 2(7.25,1.8) 3(6.75,-1.9) 4(6.75,1.8) 5(6.25,-1.9) 6(6.25,1.8) 7(5.75,-1.9) 8(5.75,1.8) 9(5.25,-1.9) 10(5.25,1.8) 11(4.75,-1.9) 12(4.75,1.8) 13(4.25,-1.9) 14(4.25,1.8) 15(3.75,-1.9) 16(3.75,1.8) 17(3.25,-1.9) 18(3.25,1.8) 19(2.75,-1.9) 20(2.75,1.8) 21(2.25,-1.9) 22(2.25,1.8) 23(1.75,-1.9) 24(1.75,1.8) 25(1.25,-1.9) 26(1.25,1.8) 27(0.75,-1.9) 28(0.75,1.8) 29(0.25,-1.9) 30(0.25,1.8) 31(-0.25,-1.9) 32(-0.25,1.8) 33(-0.75,-1.9) 34(-0.75,1.8) 35(-1.25,-1.9) 36(-1.25,1.8) 37(-1.75,-1.9) 38(-1.75,1.8) 39(-2.25,-1.9) 40(-2.25,1.8) 41(-2.75,-1.9) 42(-2.75,1.8) 43(-3.25,-1.9) 44(-3.25,1.8) 45(-3.75,-1.9) 46(-3.75,1.8) 47(-4.25,-1.9) 48(-4.25,1.8) 49(-4.75,-1.9) 50(-4.75,1.8) 51(-5.25,-1.9) 52(-5.25,1.8) 53(-5.75,-1.9) 54(-5.75,1.8) 55(-6.25,-1.9) 56(-6.25,1.8) 57(-6.75,-1.9) 58(-6.75,1.8) 59(-7.25,-1.9) 60(-7.25,1.8)
  round 1.7 hole 1: 61(-9.975,1.1) 62(9.975,1.1)
SAMTEC_LSHM-150-04-0-L-DV-A-S
  round 1 hole 1.45 unplated: (-13.5,-0.9) (13.5,-0.9)
  rect 0.3x1.5 smd: 1(12.25,-1.9) 2(12.25,1.8) 3(11.75,-1.9) 4(11.75,1.8) 5(11.25,-1.9) 6(11.25,1.8) 7(10.75,-1.9) 8(10.75,1.8) 9(10.25,-1.9) 10(10.25,1.8) 11(9.75,-1.9) 12(9.75,1.8) 13(9.25,-1.9) 14(9.25,1.8) 15(8.75,-1.9) 16(8.75,1.8) 17(8.25,-1.9) 18(8.25,1.8) 19(7.75,-1.9) 20(7.75,1.8) 21(7.25,-1.9) 22(7.25,1.8) 23(6.75,-1.9) 24(6.75,1.8) 25(6.25,-1.9) 26(6.25,1.8) 27(5.75,-1.9) 28(5.75,1.8) 29(5.25,-1.9) 30(5.25,1.8) 31(4.75,-1.9) 32(4.75,1.8) 33(4.25,-1.9) 34(4.25,1.8) 35(3.75,-1.9) 36(3.75,1.8) 37(3.25,-1.9) 38(3.25,1.8) 39(2.75,-1.9) 40(2.75,1.8) 41(2.25,-1.9) 42(2.25,1.8) 43(1.75,-1.9) 44(1.75,1.8) 45(1.25,-1.9) 46(1.25,1.8) 47(0.75,-1.9) 48(0.75,1.8) 49(0.25,-1.9) 50(0.25,1.8) 51(-0.25,-1.9) 52(-0.25,1.8) 53(-0.75,-1.9) 54(-0.75,1.8) 55(-1.25,-1.9) 56(-1.25,1.8) 57(-1.75,-1.9) 58(-1.75,1.8) 59(-2.25,-1.9) 60(-2.25,1.8) 61(-2.75,-1.9) 62(-2.75,1.8) 63(-3.25,-1.9) 64(-3.25,1.8) 65(-3.75,-1.9) 66(-3.75,1.8) 67(-4.25,-1.9) 68(-4.25,1.8) 69(-4.75,-1.9) 70(-4.75,1.8) 71(-5.25,-1.9) 72(-5.25,1.8) 73(-5.75,-1.9) 74(-5.75,1.8) 75(-6.25,-1.9) 76(-6.25,1.8) 77(-6.75,-1.9) 78(-6.75,1.8) 79(-7.25,-1.9) 80(-7.25,1.8) 81(-7.75,-1.9) 82(-7.75,1.8) 83(-8.25,-1.9) 84(-8.25,1.8) 85(-8.75,-1.9) 86(-8.75,1.8) 87(-9.25,-1.9) 88(-9.25,1.8) 89(-9.75,-1.9) 90(-9.75,1.8) 91(-10.25,-1.9) 92(-10.25,1.8) 93(-10.75,-1.9) 94(-10.75,1.8) 95(-11.25,-1.9) 96(-11.25,1.8) 97(-11.75,-1.9) 98(-11.75,1.8) 99(-12.25,-1.9) 100(-12.25,1.8)
  round 1.7 hole 1: 101(-14.975,1.1) 102(14.975,1.1)
SK_SATA_SMD_STR
  round 2.134 hole 1.35: (0,-10.37) (1,2.46)
  rect 2.4x0.9 smd: 1(0,0) 2(0,-1.27) 3(0,-2.54) 4(0,-3.81) 5(0,-5.08) 6(0,-6.35) 7(0,-7.62)
SON50P300X300X100-11N-R240X160
  rect 0.9x0.3 smd: 1(-1.45,1) 2(-1.45,0.5) 3(-1.45,0) 4(-1.45,-0.5) 5(-1.45,-1) 6(1.45,-1) 7(1.45,-0.5) 8(1.45,0) 9(1.45,0.5) 10(1.45,1)
  rect 1.6x2.4 smd: 11(0,0)
SOT23
  rect 0.762x0.635 smd: 1(-0.889,0.94) 2(-0.889,-0.965) 3(0.889,0)
SOT65P210X110-5N
  rect 0.85x0.45 smd: 1(-1.05,0.65) 2(-1.05,0) 3(-1.05,-0.65) 4(1.05,-0.65) 5(1.05,0.65)
SW_TYCO_1571983-4
  rect 1.55x0.55 smd: 1(-3.8,1.905) 2(3.8,1.905) 3(-3.8,0.635) 4(3.8,0.635) 5(-3.8,-0.635) 6(3.8,-0.635) 7(-3.8,-1.905) 8(3.8,-1.905)
TYCO_1367073
  round 1 hole 1.55 unplated: (0,4.795) (0,-4.805)
  rect 2x0.5 smd: 1(-4.1,3.395) 2(-4.1,2.595) 3(-4.1,1.795) 4(-4.1,0.995) 5(-4.1,0.195) 6(-4.1,-0.605) 7(-4.1,-1.405) 8(-4.1,-2.205) 9(-4.1,-3.005) 10(-4.1,-3.805) 11(4.1,-3.405) 12(4.1,-2.605) 13(4.1,-1.805) 14(4.1,-1.005) 15(4.1,-0.205) 16(4.1,0.595) 17(4.1,1.395) 18(4.1,2.195) 19(4.1,2.995) 20(4.1,3.795)
TYCO_6367034-1
  rect 1.75x1.75 hole 1.05: 1(-30.9,7.125) 2(-20.9,7.125) 3(-10.9,7.125) 5(-25.9,-7.125) 6(-15.9,-7.125) 7(-5.9,-7.125) 8(4.1,-7.125) 9(-30.9,-1.455) 10(-10.9,1.445) 11(-10.9,-3.955)
  rect 1.55x1.55 hole 0.85: 4(-0.9,7.125)
  round 1.65 hole 0.95: 12(-8.1,7.125) 13(-3.4,7.125) 14(1.6,7.125) 15(-8.1,-7.125) 16(-3.4,-7.125) 17(1.6,-7.125)
  round 0 smd: NC(0,0)
TYCO_6367035-1
  round 1.65 hole 0.95: 1(6.2,4.795) 2(6.2,-0.005) 3(6.2,-4.805)
  round 0 smd: NC(0,0)

## Nets
1.5VOUT: JB2.20(1.5V) LK16.1(A<0>)
1.8VOUT: JB1.40(1.8V_O) LK17.1(A<0>)
3.3VCTREF: JB1.13(3.3V_O) LK18.1(A<0>)
3.3VOUT: JB2.9(3.3V_1) JB2.11(3.3V_2) LK9.1(A<0>)
DGND: J6.A30(A<29>) J6.B30(B<29>) J6.C30(C<29>)
GND_SIGNAL: C1.1(A<0>) C1_1.1(A<0>) C2.1(A<0>) C2_1.1(A<0>) C3.1(A<0>) C3_1.1(A<0>) C3_1_1.1(A<0>) C3_2_1.1(A<0>) C3_3_1.1(A<0>) C3_4_1.1(A<0>) C3_5_1.1(A<0>) C3_6_1.1(A<0>) C3_7_1.1(A<0>) C3_8_1.1(A<0>) C4.1(A<0>) C4_1.1(A<0>) C4_1_1.1(A<0>) C4_2_1.1(A<0>) C4_3_1.1(A<0>) C4_4_1.1(A<0>) C4_5_1.1(A<0>) C4_6_1.1(A<0>) C4_7_1.1(A<0>) C4_8_1.1(A<0>) C5.1(A<0>) C5_1.1(A<0>) C5_1_1.1(A<0>) C5_2_1.1(A<0>) C5_3_1.1(A<0>) C5_4_1.1(A<0>) C5_5_1.1(A<0>) C5_6_1.1(A<0>) C5_7_1.1(A<0>) C5_8_1.1(A<0>) C6.1(A<0>) C6_1.1(A<0>) C6_1_1.1(A<0>) C6_2_1.1(A<0>) C6_3_1.1(A<0>) C6_4_1.1(A<0>) C6_5_1.1(A<0>) C6_6_1.1(A<0>) C6_7_1.1(A<0>) C6_8_1.1(A<0>) C7.1(A<0>) C7_1.1(A<0>) C8.1(A<0>) C8_1.1(A<0>) C9.1(A<0>) C9_1.1(A<0>) C10.1(A<0>) C10_1.1(A<0>) C11.1(A<0>) C12.1(A<0>) C13.1(A<0>) C14.1(A<0>) C15.1(A<0>) C16.1(A<0>) C17.1(A<0>) C18.1(A<0>) C19.1(A<0>) C20.1(A<0>) C21.1(A<0>) C26.1(A<0>) C27.1(A<0>) C28.1(A<0>) C29.1(A<0>) C30.1(A<0>) C31.1(A<0>) C32.1(A<0>) C33.1(A<0>) C34.1(A<0>) C35.1(A<0>) C36.1(A<0>) C37.1(A<0>) C38.1(A<0>) C39.1(A<0>) C40.1(A<0>) C43.1(A<0>) C44.1(A<0>) C47.2(B<0>) C48.2(B<0>) IC1.4(PGND) IC1.8 IC1.11 IC2.4(PGND) IC2.8 IC2.11 IC3.8 IC3.24(A0) IC3.25(A1) IC3.26(A2_SS) IC3.31 IC3.36(CMODE) IC3.37 IC4.3 J1.3(A<2>) J1.5(A<4>) J1.7(A<6>) J1.9(A<8>) J1.11(A<10>) J2.2(A<1>) J3.1(A<0>) J4.1(A<0>) J5.1(A<0>) J6.A1(A<0>) J6.A4(A<3>) J6.A7(A<6>) J6.A10(A<9>) J6.A13(A<12>) J6.A16(A<15>) J6.A19(A<18>) J6.A22(A<21>) J6.A25(A<24>) J6.A28(A<27>) J6.B1(B<0>) J6.B2(B<1>) J6.B3(B<2>) J6.B4(B<3>) J6.B5(B<4>) J6.B6(B<5>) J6.B7(B<6>) J6.B8(B<7>) J6.B9(B<8>) J6.B10(B<9>) J6.B11(B<10>) J6.B12(B<11>) J6.B13(B<12>) J6.B14(B<13>) J6.B15(B<14>) J6.B16(B<15>) J6.B17(B<16>) J6.B18(B<17>) J6.B19(B<18>) J6.B20(B<19>) J6.B21(B<20>) J6.B22(B<21>) J6.B23(B<22>) J6.B24(B<23>) J6.B25(B<24>) J6.B26(B<25>) J6.B27(B<26>) J6.B28(B<27>) J6.C1(C<0>) J6.C4(C<3>) J6.C7(C<6>) J6.C10(C<9>) J6.C13(C<12>) J6.C16(C<15>) J6.C19(C<18>) J6.C22(C<21>) J6.C25(C<24>) J6.C28(C<27>) J7.1(VEET1) J7.9(VEER/RS1) J7.10(VEER1) J7.11(VEER2) J7.14(VEER3) J7.17(VEET2) J7.20(VEET3) J8.1(VEET1) J8.9(VEER/RS1) J8.10(VEER1) J8.11(VEER2) J8.14(VEER3) J8.17(VEET2) J8.20(VEET3) J9.3(A<2>) J9.4(A<3>) J9.7(A<6>) J9.8(A<7>) J9.11(A<10>) J9.12(A<11>) J9.15(A<14>) J9.16(A<15>) J9.19(A<18>) J9.20(A<19>) J9.23(A<22>) J9.24(A<23>) J9.27(A<26>) J9.28(A<27>) J9.31(A<30>) J9.32(A<31>) J10.2(A<1>) J11.2(A<1>) J11.5(A<4>) J11.8(A<7>) J11.11(A<10>) J11.20 J11.21 J11.22 J11.23 J12.1(A<0>) J13.1(A<0>) J14.1(A<0>) J15.2(A<1>) JB1.1(GND_15) JB1.7(GND_5) JB1.19(GND_6) JB1.25(GND_7) JB1.30(GND_1) JB1.33(GND_8) JB1.43(GND_9) JB1.53(GND_10) JB1.54(GND_2) JB1.63(GND_11) JB1.64(GND_3) JB1.73(GND_12) JB1.74(GND_4) JB1.83(GND_13) JB1.89(GND_14) JB2.19(GND_6) JB2.29(GND_7) JB2.39(GND) JB2.40(GND_1) JB2.49(GND_8) JB2.50(GND_2) JB2.59(GND_9) JB2.60(GND_3) JB2.69(GND_10) JB2.70(GND_4) JB2.79(GND_11) JB2.80(GND_5) JB2.89(GND_12) JB3.5(GND8) JB3.6(GND1) JB3.11(GND9) JB3.12(GND2) JB3.17(GND10) JB3.18(GND3) JB3.23(GND11) JB3.24(GND4) JB3.29(GND12) JB3.30(GND5) JB3.35(GND13) JB3.36(GND6) JB3.45(GND14) JB3.46(GND7) LK1_2.1(A<0>) LK2_2.1(A<0>) LK3_2.1(A<0>) LK4_2.1(A<0>) LK8.1(A<0>) LK27.1(A<0>) QZ1.3 R3_1.1(A<0>) R8.1(A<0>) R14.1(A<0>) R16.1(A<0>) R18.1(A<0>) R20.1(A<0>) R23.2(B<0>) REG1.3(GND) REG1.6 REG2.3(GND) REG2.6 REG3.3(GND) REG3.6 RZ1.1(A<0>) RZ1.2(A<0>) RZ1.3(A<0>) RZ1.4(A<0>) RZ2.1(A<0>) RZ2.2(A<0>) RZ2.3(A<0>) RZ2.4(A<0>) SFP1.1 SFP1.2 SFP1.3 SFP1.4 SFP1.5 SFP1.6 SFP1.7 SFP1.8 SFP1.9 SFP1.10 SFP1.11 SFP1.12 SFP1.13 SFP1.14 SFP1.15 SFP1.16 SFP1.17 SFP2.1 SFP2.2 SFP2.3 SFP3.1 SFP3.2 SFP3.3 SFP3.4 SFP3.5 SFP3.6 SFP3.7 SFP3.8 SFP3.9 SFP3.10 SFP3.11 SFP3.12 SFP3.13 SFP3.14 SFP3.15 SFP3.16 SFP3.17 SFP4.1 SFP4.2 SFP4.3 U1.1(A<0>) U1.4(A<3>) U1.7(A<6>) U1_1.A1(GND) U1_1.A2(GND_1) U1_1.A3(GND_2) U1_1.A4(GND_3) U1_1.A5(GND_4) U1_1.A6(GND_5) U1_1.A7(PAR/SER) U1_1.A9(OGND) U1_1.A10(OGND_1) U1_1.B4(GND_6) U1_1.B5(GND_7) U1_1.B7(GND_8) U1_1.B9(OGND_2) U1_1.B10(OGND_3) U1_1.C3(GND_9) U1_1.C4(GND_10) U1_1.C6(GND_11) U1_1.D1(GND_12) U1_1.D2(GND_13) U1_1.D5(GND_14) U1_1.E5(GND_15) U1_1.F1(GND_16) U1_1.F2(GND_17) U1_1.F4(GND_18) U1_1.F5(GND_19) U1_1.F6(GND_20) U1_1.G3(GND_21) U1_1.G4(GND_22) U1_1.G5(GND_23) U1_1.G6(GND_24) U1_1.H3(GND_25) U1_1.H4(GND_26) U1_1.H5(GND_27) U1_1.H6(GND_28) U1_1.H9(OGND_4) U1_1.H10(OGND_5) U1_1.J1(GND_29) U1_1.J2(GND_30) U1_1.J4(GND_31) U1_1.J5(GND_32) U1_1.J6(GND_33) U1_1.K5(GND_34) U1_1.K6(GND_35) U1_1.L1(GND_36) U1_1.L2(GND_37) U1_1.M3(GND_38) U1_1.M4(GND_39) U1_1.N4(GND_40) U1_1.N5(GND_41) U1_1.N6(GND_42) U1_1.N7(GND_43) U1_1.N9(OGND_6) U1_1.N10(OGND_7) U1_1.P1(GND_44) U1_1.P2(GND_45) U1_1.P3(GND_46) U1_1.P4(GND_47) U1_1.P7(GND_48) U1_1.P9(OGND_8) U1_1.P10(OGND_9) U2.1(A<0>) U2.4(A<3>) U2.7(A<6>) Z1.2(AN)
P1V8: C3.2(B<0>) C3_1.2(B<0>) C4_1.2(B<0>) C6.2(B<0>) JB2.2(VCCIO13_1) JB2.4(VCCIO13_2) L8.2(B<0>) R4.2(C2<0>) R27.2(B<0>) R28.2(B<0>) U1_1.G9(OVDD) U1_1.G10(OVDD_1)
P1V8A: C1_1.2(B<0>) C2_1.2(B<0>) C5_1.2(B<0>) C6_1.2(B<0>) C7_1.2(B<0>) C8_1.2(B<0>) C9_1.2(B<0>) C10_1.2(B<0>) L8.1(A<0>) R2_1.2(B<0>) U1_1.D3(VDD) U1_1.D4(VDD_1) U1_1.E3(VDD_2) U1_1.E4(VDD_3) U1_1.K3(VDD_4) U1_1.K4(VDD_5) U1_1.L3(VDD_6) U1_1.L4(VDD_7)
P2V5: C2.2(B<0>) C5.2(B<0>) J6.A31(A<30>) J6.B31(B<30>) J6.C31(C<30>) JB1.10(VCCIO16_1) JB1.12(VCCIO16_2) JB2.8(VCCIO15_1) JB2.10(VCCIO15_2) L9.2(B<0>) L10.2(B<0>) R3.2(C2<0>) R5.2(B<0>) SW1.1(A<0>) SW1.3(A<0>) SW1.5(A<0>) SW1.7(A<0>)
P3V3: C1.2(B<0>) C4.2(B<0>) C17.2(B<0>) C18.2(B<0>) C28.2(B<0>) C29.2(B<0>) C35.2(B<0>) C40.2(B<0>) IC4.5 J6.B29(B<28>) JB1.14(3.3VIN_1) JB1.16(3.3VIN_2) L1.1(A<0>) L2.2(B<0>) L3.1(A<0>) L4.2(B<0>) L5.1(A<0>) L6.1(A<0>) LK7.1(A<0>) R2.2(C2<0>) R11.2(B<0>) R12.2(B<0>)
P5V: C47.1(A<0>) J2.1(A<0>) J6.A32(A<31>) J6.B32(B<31>) J6.C32(C<31>) L7.2(B<0>) R24.1(A<0>) R29.2(B<0>) REG1.2(VIN) REG2.2(VIN) REG3.2(VIN)
VCC_CLK_40: C36.2(B<0>) C37.2(B<0>) C38.2(B<0>) C39.2(B<0>) IC3.5 IC3.10 IC3.32 L5.2(B<0>) R13.2(B<0>) R15.2(B<0>) R17.2(B<0>) R19.2(B<0>) R21.2(B<0>) R22.2(B<0>)
VCC_REFOSC: C43.2(B<0>) C44.2(B<0>) L6.2(B<0>) QZ1.1(ENDIS) QZ1.6
VIN_DCDC: C48.1(A<0>) JB1.2(VIN_1) JB1.4(VIN_2) JB1.6(VIN_3) JB2.1(VIN_1) JB2.3(VIN_2) JB2.5(VIN_3) JB2.7(VIN_4) L7.1(A<0>)
ADC_CSA: JB1.26(B13_L9*) LK26.1(A<0>) U1_1.L5(CSA)
ADC_CSB: JB1.28(B13_L9) LK23.1(A<0>) U1_1.M5(CSB)
ADC_SCK: JB1.22(B13_L11*) LK25.1(A<0>) U1_1.L6(SCK)
ADC_SDI: JB1.24(B13_L11) LK22.1(A<0>) U1_1.M6(SDI)
ADC_SDOA: JB1.20(B13_L3*) LK24.1(A<0>) R27.1(A<0>) U1_1.E6(SDOA)
ADC_SDOB: JB1.18(B13_L3) LK21.1(A<0>) R28.1(A<0>) U1_1.D6(SDOB)
AIN+<1>_1: C5_1_1.2(B<0>) R3_1_1.2(B<0>) U1_1.B2(AIN1+)
AIN+<2>_1: C5_8_1.2(B<0>) R3_8_1.2(B<0>) U1_1.C2(AIN2+)
AIN+<3>_1: C5_7_1.2(B<0>) R3_7_1.2(B<0>) U1_1.E2(AIN3+)
AIN+<4>_1: C5_6_1.2(B<0>) R3_6_1.2(B<0>) U1_1.G2(AIN4+)
AIN+<5>_1: C5_5_1.2(B<0>) R3_5_1.2(B<0>) U1_1.H1(AIN5+)
AIN+<6>_1: C5_4_1.2(B<0>) R3_4_1.2(B<0>) U1_1.K1(AIN6+)
AIN+<7>_1: C5_3_1.2(B<0>) R3_3_1.2(B<0>) U1_1.M1(AIN7+)
AIN+<8>_1: C5_2_1.2(B<0>) R3_2_1.2(B<0>) U1_1.N1(AIN8+)
AIN-<1>_1: C6_1_1.2(B<0>) R4_1_1.2(B<0>) U1_1.B1(AIN1-)
AIN-<2>_1: C6_8_1.2(B<0>) R4_8_1.2(B<0>) U1_1.C1(AIN2-)
AIN-<3>_1: C6_7_1.2(B<0>) R4_7_1.2(B<0>) U1_1.E1(AIN3-)
AIN-<4>_1: C6_6_1.2(B<0>) R4_6_1.2(B<0>) U1_1.G1(AIN4-)
AIN-<5>_1: C6_5_1.2(B<0>) R4_5_1.2(B<0>) U1_1.H2(AIN5-)
AIN-<6>_1: C6_4_1.2(B<0>) R4_4_1.2(B<0>) U1_1.K2(AIN6-)
AIN-<7>_1: C6_3_1.2(B<0>) R4_3_1.2(B<0>) U1_1.M2(AIN7-)
AIN-<8>_1: C6_2_1.2(B<0>) R4_2_1.2(B<0>) U1_1.N2(AIN8-)
ANA_IN+<0>: C1_2_1.1(A<0>) J6.A2(A<1>)
ANA_IN+<1>: C1_3_1.1(A<0>) J6.C2(C<1>)
ANA_IN+<2>: C1_4_1.1(A<0>) J6.A5(A<4>)
ANA_IN+<3>: C1_5_1.1(A<0>) J6.C5(C<4>)
ANA_IN+<4>: C1_6_1.1(A<0>) J6.A8(A<7>)
ANA_IN+<5>: C1_7_1.1(A<0>) J6.C8(C<7>)
ANA_IN+<6>: C1_8_1.1(A<0>) J6.A11(A<10>)
ANA_IN+<7>: C1_1_1.1(A<0>) J6.C11(C<10>)
ANA_IN-<0>: C2_2_1.1(A<0>) J6.A3(A<2>)
ANA_IN-<1>: C2_3_1.1(A<0>) J6.C3(C<2>)
ANA_IN-<2>: C2_4_1.1(A<0>) J6.A6(A<5>)
ANA_IN-<3>: C2_5_1.1(A<0>) J6.C6(C<5>)
ANA_IN-<4>: C2_6_1.1(A<0>) J6.A9(A<8>)
ANA_IN-<5>: C2_7_1.1(A<0>) J6.C9(C<8>)
ANA_IN-<6>: C2_8_1.1(A<0>) J6.A12(A<11>)
ANA_IN-<7>: C2_1_1.1(A<0>) J6.C12(C<11>)
B13<1>: JB3.43(B13_L1*)
B13<2>: JB3.51(B13_L2*)
B13<4>: JB3.49(B13_L4*)
B13<5>: JB1.23(B13_L5)
B13<6>: JB1.17(B13_L6)
B13<10>: JB3.40(B13_L10*)
B13<13>: JB3.60(B13_L13*)
B13<14>: JB3.3(B13_L14*)
B13<15>: JB3.44(B13_L15*)
B13<16>: JB3.39(B13_L16*)
B13<17>: JB3.4(B13_L17*)
B13_N<1>: JB3.41(B13_L1)
B13_N<2>: JB3.53(B13_L2)
B13_N<4>: JB3.47(B13_L4)
B13_N<5>: JB1.21(B13_L5*)
B13_N<6>: JB1.15(B13_L6*)
B13_N<10>: JB3.38(B13_L10)
B13_N<13>: JB3.58(B13_L13)
B13_N<14>: JB3.1(B13_L14)
B13_N<15>: JB3.42(B13_L15)
B13_N<16>: JB3.37(B13_L16)
B13_N<17>: JB3.2(B13_L17)
B14<15>: JB2.36(B14_L15)
B14_N<12>: JB2.23(B14_L12*)
B14_N<15>: JB2.38(B14_L15*)
B15<1>: JB2.72(B15_L1)
B15<2>: JB2.78(B15_L2)
B15<3>: J9.22(A<21>) JB2.56(B15_L3)
B15<7>: J9.6(A<5>) JB2.43(B15_L7)
B15<8>: J9.2(A<1>) JB2.37(B15_L8)
B15<9>: JB2.33(B15_L9)
B15<10>: J9.26(A<25>) JB2.63(B15_L10)
B15<11>: J9.14(A<13>) JB2.52(B15_L11)
B15<12>: J9.18(A<17>) JB2.55(B15_L12)
B15<13>: J9.34(A<33>) JB2.45(B15_L13)
B15<14>: J9.10(A<9>) JB2.51(B15_L14)
B15<15>: JB2.75(B15_L15)
B15<16>: JB2.66(B15_L16)
B15<17>: J9.30(A<29>) JB2.64(B15_L17)
B15<18>: JB2.65(B15_L18)
B15<19>: JB2.46(B15_L19)
B15<20>: JB2.71(B15_L20)
B15<21>: JB2.85(B15_L21)
B15<22>: JB2.97(B15_L22)
B15<23>: JB2.42(B15_L23)
B15<24>: JB2.93(B15_L24)
B15_IO0_2: JB2.90(B15_IO0)
B15_IO25_2: JB2.99(B15_IO25)
B15_N<1>: JB2.74(B15_L1*)
B15_N<2>: JB2.76(B15_L2*)
B15_N<3>: J9.21(A<20>) JB2.58(B15_L3*)
B15_N<7>: J9.5(A<4>) JB2.41(B15_L7*)
B15_N<8>: J9.1(A<0>) JB2.35(B15_L8*)
B15_N<9>: JB2.31(B15_L9*)
B15_N<10>: J9.25(A<24>) JB2.61(B15_L10*)
B15_N<11>: J9.13(A<12>) JB2.54(B15_L11*)
B15_N<12>: J9.17(A<16>) JB2.57(B15_L12*)
B15_N<13>: J9.33(A<32>) JB2.47(B15_L13*)
B15_N<14>: J9.9(A<8>) JB2.53(B15_L14*)
B15_N<15>: JB2.77(B15_L15*)
B15_N<16>: JB2.68(B15_L16*)
B15_N<17>: J9.29(A<28>) JB2.62(B15_L17*)
B15_N<18>: JB2.67(B15_L18*)
B15_N<19>: JB2.48(B15_L19*)
B15_N<20>: JB2.73(B15_L20*)
B15_N<21>: JB2.87(B15_L21*)
B15_N<22>: JB2.95(B15_L22*)
B15_N<23>: JB2.44(B15_L23*)
B15_N<24>: JB2.91(B15_L24*)
B16<1>: JB1.99(B16_L1)
B16<2>: JB1.81(B16_L2) LD3.1(A)
B16<3>: JB1.72(B16_L3) U1_1.M8(OUT8A+)
B16<4>: JB1.95(B16_L4) RZ2.7(B<0>) SW1.6(B<0>)
B16<5>: JB1.77(B16_L5)
B16<6>: JB1.87(B16_L6) RZ2.5(B<0>) SW1.2(B<0>)
B16<7>: JB1.61(B16_L7) U1_1.J10(FRB+)
B16<8>: JB1.84(B16_L8) LD5.1(A)
B16<9>: JB1.57(B16_L9) U1_1.H8(FRA+)
B16<10>: JB1.71(B16_L10) U1_1.L7(OUT7A+)
B16<11>: JB1.65(B16_L11) U1_1.J7(OUT5A+)
B16<12>: JB1.76(B16_L12) U1_1.F9(DCOB+)
B16<13>: JB1.60(B16_L13) U1_1.G7(DCOA+)
B16<14>: JB1.66(B16_L14) U1_1.K10(OUT6A+)
B16<15>: JB1.46(B16_L15)
B16<16>: JB1.35(B16_L16)
B16<17>: JB1.47(B16_L17)
B16<18>: JB1.51(B16_L18) U1_1.E8(OUT1A+)
B16<19>: JB1.41(B16_L19)
B16<20>: JB1.50(B16_L20) U1_1.C10(OUT4A+)
B16<21>: JB1.56(B16_L21) U1_1.D9(OUT3A+)
B16<23>: JB1.42(B16_L23) U1_1.A8(OUT2A+)
B16<24>: JB1.38(B16_L24)
B16_N<1>: JB1.97(B16_L1*)
B16_N<2>: JB1.79(B16_L2*) LD4.1(A)
B16_N<3>: JB1.70(B16_L3*) U1_1.L8(OUT8A-)
B16_N<4>: JB1.93(B16_L4*) RZ2.8(B<0>) SW1.8(B<0>)
B16_N<5>: JB1.75(B16_L5*)
B16_N<6>: JB1.85(B16_L6*) RZ2.6(B<0>) SW1.4(B<0>)
B16_N<7>: JB1.59(B16_L7*) U1_1.J9(FRB-)
B16_N<8>: JB1.82(B16_L8*) LD6.1(A)
B16_N<9>: JB1.55(B16_L9*) U1_1.H7(FRA-)
B16_N<10>: JB1.69(B16_L10*) U1_1.M7(OUT7A-)
B16_N<11>: JB1.67(B16_L11*) U1_1.J8(OUT5A-)
B16_N<12>: JB1.78(B16_L12*) U1_1.F10(DCOB-)
B16_N<13>: JB1.62(B16_L13*) U1_1.G8(DCOA-)
B16_N<14>: JB1.68(B16_L14*) U1_1.K9(OUT6A-)
B16_N<15>: JB1.48(B16_L15*)
B16_N<16>: JB1.37(B16_L16*)
B16_N<17>: JB1.45(B16_L17*)
B16_N<18>: JB1.49(B16_L18*) U1_1.E7(OUT1A-)
B16_N<19>: JB1.39(B16_L19*)
B16_N<20>: JB1.52(B16_L20*) U1_1.C9(OUT4A-)
B16_N<21>: JB1.58(B16_L21*) U1_1.D10(OUT3A-)
B16_N<23>: JB1.44(B16_L23*) U1_1.B8(OUT2A-)
B16_N<24>: JB1.36(B16_L24*)
BUSY_OUT: J11.1(A<0>) JB2.88(B15_L5)
BUSY_OUT_N: J11.3(A<2>) JB2.86(B15_L5*)
CLK40_ADC0: C11_1.1(A<0>) IC3.28(CKOUT1+) J14.3(A<2>)
CLK40_ADC0_N: C12_1.1(A<0>) IC3.29(CKOUT1-) J14.2(A<1>)
CLK40_CLK1_VALID_N: IC3.3(INT_C1B) JB1.91(B14_L24)
CLK40_CLK2_VALID_N: IC3.4(C2B) JB1.100(B14_L24*)
CLK40_CLK_SEL: IC3.21(CS_CA) JB2.28(B14_L13*)
CLK40_I2C_SCL: IC3.22(SCL) JB3.54(B14_L20*) R21.1(A<0>)
CLK40_I2C_SDA: IC3.23(SDA/SDO) JB3.52(B14_L20) R22.1(A<0>)
CLK40_IN: C41.2(B<0>) J11.10(A<9>) J12.3(A<2>) R13.1(A<0>) R14.2(B<0>)
CLK40_IN_N: C42.2(B<0>) J11.12(A<11>) J12.2(A<1>) R17.1(A<0>) R18.2(B<0>)
CLK40_LOL: IC3.18(LOL) JB1.92(B14_L9)
CLK40_PHASE_DEC: IC3.19(DEC) JB1.88(B14_L18)
CLK40_PHASE_INC: IC3.20(INC) JB1.86(B14_L18*)
CLK40_RATE0: IC3.11(RATE0) JB3.48(B14_L5) R19.1(A<0>) R20.2(B<0>)
CLK40_RATE1: IC3.15(RATE1) JB1.98(B14_L4*) R15.1(A<0>) R16.2(B<0>)
CLK40_RST_N: IC3.1(RST*) JB3.50(B14_L5*)
CLK+_1: C11_1.2(B<0>) R1_1.2(B<0>) U1_1.P5(CLK+)
CLK-_1: C12_1.2(B<0>) R1_1.1(A<0>) U1_1.P6(CLK-)
CLK_40_FPGA: IC3.35(CKOUT2+) JB3.59(B13_L12*) R1.1(A<0>)
CLK_40_FPGA_N: IC3.34(CKOUT2-) JB3.57(B13_L12) R1.2(B<0>)
CLK_40_FROM_FPGA: IC3.12(CKIN2+) JB1.32(B16_L22)
CLK_40_FROM_FPGA_N: IC3.13(CKIN2-) JB1.34(B16_L22*)
EN1: JB1.27(EN1) LK2.1(A<0>)
EXTERNAL_SCL: J6.C29(C<28>) JB1.94(B14_L9*) R12.1(A<0>)
EXTERNAL_SDA: J6.A29(A<28>) JB1.96(B14_L4) R11.1(A<0>)
FPGA_TCK: J1.6(A<5>) JB2.100(TCK)
FPGA_TDI: J1.10(A<9>) JB2.96(TDI)
FPGA_TDO: J1.8(A<7>) JB2.98(TDO)
FPGA_TMS: J1.4(A<3>) JB2.94(TMS)
JTAG_VREF: J1.2(A<1>) JB2.92(3.3V_JTAG)
JTAGEN: JB1.90(JTAGEN) LK3.1(A<0>) R23.1(A<0>)
MGT_CLK: J15.3(A<2>) JB3.34(MGT_CLK1)
MGT_CLK*: J15.1(A<0>) JB3.32(MGT_CLK1*)
MGT_RX<0>: J7.13(RD+) JB3.9(MGT_RX0)
MGT_RX<1>: J8.13(RD+) JB3.15(MGT_RX1)
MGT_RX<2>: JB3.21(MGT_RX2) U1.6(A<5>)
MGT_RX<3>: JB3.27(MGT_RX3) U2.2(A<1>)
MGT_RX_N<0>: J7.12(RD-) JB3.7(MGT_RX0*)
MGT_RX_N<1>: J8.12(RD-) JB3.13(MGT_RX1*)
MGT_RX_N<2>: JB3.19(MGT_RX2*) U1.5(A<4>)
MGT_RX_N<3>: JB3.25(MGT_RX3*) U2.3(A<2>)
MGT_TX<0>: J7.18(TD+) JB3.10(MGT_TX0)
MGT_TX<1>: J8.18(TD+) JB3.16(MGT_TX1)
MGT_TX<2>: C24.2(B<0>) JB3.22(MGT_TX2)
MGT_TX<3>: C23.2(B<0>) JB3.28(MGT_TX3)
MGT_TX_N<0>: J7.19(TD-) JB3.8(MGT_TX0*)
MGT_TX_N<1>: J8.19(TD-) JB3.14(MGT_TX1*)
MGT_TX_N<2>: C22.2(B<0>) JB3.20(MGT_TX2*)
MGT_TX_N<3>: C25.2(B<0>) JB3.26(MGT_TX3*)
MODE: JB1.31(MODE) LK4.1(A<0>)
NOSEQ: JB1.8(NOSEQ) LK5.1(A<0>)
PGOOD: IC4.2(A) JB1.29(PGOOD) LK1.1(A<0>)
PGOOD_5V: IC4.4(Y) R25.1(A<0>) R26.1(A<0>) R29.1(A<0>)
RESIN: JB2.17(RESIN) LK6.1(A<0>)
SENSE_1: R2_1.1(A<0>) R3_1.2(B<0>) U1_1.C5(SENSE)
SFP0_LOS: J7.8(LOS) JB2.34(B14_L16*)
SFP0_MOD_DEF0: J7.6(MOD_DEF0/MOD_ABS) JB2.27(B14_L11*)
SFP0_MOD_DEF1: J7.5(MOD_DEF1/SCL) JB2.26(B14_L13)
SFP0_MOD_DEF2: J7.4(MOD_DEF2/SDA) JB2.25(B14_L11)
SFP0_RATE_SELECT: J7.7(RATE_SELECT/RS0) JB2.32(B14_L16)
SFP0_TX_DISABLE: J7.3(TX_DISABLE) JB2.24(B14_L14*)
SFP0_TX_FAULT: J7.2(TX_FAULT) JB2.21(B14_L12)
SFP1_LOS: J8.8(LOS) JB2.22(B14_L14)
SFP1_MOD_DEF0: J8.6(MOD_DEF0/MOD_ABS) JB2.16(B14_L17*)
SFP1_MOD_DEF1: J8.5(MOD_DEF1/SCL) JB2.15(B14_L10)
SFP1_MOD_DEF2: J8.4(MOD_DEF2/SDA) JB2.13(B14_L10*)
SFP1_RATE_SELECT: J8.7(RATE_SELECT/RS0) JB2.18(B14_L17)
SFP1_TX_DISABLE: J8.3(TX_DISABLE) JB2.14(B14_L8)
SFP1_TX_FAULT: J8.2(TX_FAULT) JB2.12(B14_L8*)
SYNC_IN: J11.7(A<6>) JB2.83(B15_L6)
SYNC_IN_N: J11.9(A<8>) JB2.81(B15_L6*)
TRIG_IN: J11.4(A<3>) JB2.82(B15_L4)
TRIG_IN_N: J11.6(A<5>) JB2.84(B15_L4*)
UNNAMED_1_CAPCERSMDCL1_I1_B: C1_1_1.2(B<0>) R1_1_1.2(B<0>) R3_1_1.1(A<0>)
UNNAMED_1_CAPCERSMDCL1_I1_B_1: C1_2_1.2(B<0>) R1_2_1.2(B<0>) R3_2_1.1(A<0>)
UNNAMED_1_CAPCERSMDCL1_I1_B_2: C1_3_1.2(B<0>) R1_3_1.2(B<0>) R3_3_1.1(A<0>)
UNNAMED_1_CAPCERSMDCL1_I1_B_3: C1_4_1.2(B<0>) R1_4_1.2(B<0>) R3_4_1.1(A<0>)
UNNAMED_1_CAPCERSMDCL1_I1_B_4: C1_5_1.2(B<0>) R1_5_1.2(B<0>) R3_5_1.1(A<0>)
UNNAMED_1_CAPCERSMDCL1_I1_B_5: C1_6_1.2(B<0>) R1_6_1.2(B<0>) R3_6_1.1(A<0>)
UNNAMED_1_CAPCERSMDCL1_I1_B_6: C1_7_1.2(B<0>) R1_7_1.2(B<0>) R3_7_1.1(A<0>)
UNNAMED_1_CAPCERSMDCL1_I1_B_7: C1_8_1.2(B<0>) R1_8_1.2(B<0>) R3_8_1.1(A<0>)
UNNAMED_1_CAPCERSMDCL1_I10_B: C2_1_1.2(B<0>) R2_1_1.2(B<0>) R4_1_1.1(A<0>)
UNNAMED_1_CAPCERSMDCL1_I10_B_1: C2_2_1.2(B<0>) R2_2_1.2(B<0>) R4_2_1.1(A<0>)
UNNAMED_1_CAPCERSMDCL1_I10_B_2: C2_3_1.2(B<0>) R2_3_1.2(B<0>) R4_3_1.1(A<0>)
UNNAMED_1_CAPCERSMDCL1_I10_B_3: C2_4_1.2(B<0>) R2_4_1.2(B<0>) R4_4_1.1(A<0>)
UNNAMED_1_CAPCERSMDCL1_I10_B_4: C2_5_1.2(B<0>) R2_5_1.2(B<0>) R4_5_1.1(A<0>)
UNNAMED_1_CAPCERSMDCL1_I10_B_5: C2_6_1.2(B<0>) R2_6_1.2(B<0>) R4_6_1.1(A<0>)
UNNAMED_1_CAPCERSMDCL1_I10_B_6: C2_7_1.2(B<0>) R2_7_1.2(B<0>) R4_7_1.1(A<0>)
UNNAMED_1_CAPCERSMDCL1_I10_B_7: C2_8_1.2(B<0>) R2_8_1.2(B<0>) R4_8_1.1(A<0>)
UNNAMED_2_CON3P_I232_A: J10.1(A<0>) JB3.31(CLKIN2*)
UNNAMED_2_CON3P_I232_A_1: J10.3(A<2>) JB3.33(CLKIN2)
UNNAMED_3_CAPCERSMDCL2_I26_B: C7.2(B<0>) C11.2(B<0>) C15.2(B<0>) IC1.2(VLDOIN) IC1.7(EN) IC1.10(VIN) L9.1(A<0>) R9.2(B<0>)
UNNAMED_3_CAPCERSMDCL2_I29_B: C9.2(B<0>) IC1.6(REFOUT)
UNNAMED_3_CAPCERSMDCL2_I33_B: C8.2(B<0>) C13.2(B<0>) C16.2(B<0>) IC2.2(VLDOIN) IC2.7(EN) IC2.10(VIN) L10.1(A<0>) R10.2(B<0>)
UNNAMED_3_CAPCERSMDCL2_I44_B: C10.2(B<0>) IC2.6(REFOUT)
UNNAMED_3_CON3P_I55_A: J5.3(A<2>) R4.3(S1<0>)
UNNAMED_3_CON3P_I55_A_1: J5.2(A<1>) R4.4(S2<0>)
UNNAMED_3_CON3P_I62_A: J4.3(A<2>) R3.3(S1<0>)
UNNAMED_3_CON3P_I62_A_1: J4.2(A<1>) R3.4(S2<0>)
UNNAMED_3_CON3P_I71_A: J3.3(A<2>) R2.3(S1<0>)
UNNAMED_3_CON3P_I71_A_1: J3.2(A<1>) R2.4(S2<0>)
UNNAMED_3_LM40411V2_I83_CAT: R5.1(A<0>) R6.2(B<0>) Z1.1(CAT)
UNNAMED_3_LT1963EQ_I11_SENSE: R4.1(C1<0>) REG3.4(VOUT) REG3.5(SENSE/ADJ)
UNNAMED_3_LT1963EQ_I11_SHDN: R26.2(B<0>) REG3.1(SHDN*)
UNNAMED_3_LT1963EQ_I12_SENSE: R2.1(C1<0>) REG1.4(VOUT) REG1.5(SENSE/ADJ)
UNNAMED_3_LT1963EQ_I12_SHDN: R24.2(B<0>) REG1.1(SHDN*)
UNNAMED_3_LT1963EQ_I64_SENSE: R3.1(C1<0>) REG2.4(VOUT) REG2.5(SENSE/ADJ)
UNNAMED_3_LT1963EQ_I64_SHDN: R25.2(B<0>) REG2.1(SHDN*)
UNNAMED_3_RSMD0603_I25_A: IC1.9(PGOOD) LK19.1(A<0>) R9.1(A<0>)
UNNAMED_3_RSMD0603_I39_A: IC2.9(PGOOD) LK20.1(A<0>) R10.1(A<0>)
UNNAMED_7_CAPCERSMDCL2_I3_A: C23.1(A<0>) U2.6(A<5>)
UNNAMED_7_CAPCERSMDCL2_I5_A: C25.1(A<0>) U2.5(A<4>)
UNNAMED_7_CAPCERSMDCL2_I11_A: C22.1(A<0>) U1.3(A<2>)
UNNAMED_7_CAPCERSMDCL2_I12_A: C24.1(A<0>) U1.2(A<1>)
UNNAMED_7_CAPCERSMDCL2_I16_B: C26.2(B<0>) C27.2(B<0>) J7.16(VCCT) L2.1(A<0>)
UNNAMED_7_CAPCERSMDCL2_I17_B: C19.2(B<0>) C20.2(B<0>) C21.2(B<0>) J7.15(VCCR) L1.2(B<0>)
UNNAMED_7_CAPCERSMDCL2_I27_B: C33.2(B<0>) C34.2(B<0>) J8.16(VCCT) L4.1(A<0>)
UNNAMED_7_CAPCERSMDCL2_I31_B: C30.2(B<0>) C31.2(B<0>) C32.2(B<0>) J8.15(VCCR) L3.2(B<0>)
UNNAMED_8_LED_I105_K: LD6.2(K) RZ1.8(B<0>)
UNNAMED_8_LED_I106_K: LD3.2(K) RZ1.5(B<0>)
UNNAMED_8_LED_I107_K: LD5.2(K) RZ1.7(B<0>)
UNNAMED_8_LED_I108_K: LD4.2(K) RZ1.6(B<0>)
UNNAMED_9_CAPCERSMDCL2_I82_A: C41.1(A<0>) IC3.17(CKIN1-)
UNNAMED_9_CAPCERSMDCL2_I83_A: C42.1(A<0>) IC3.16(CKIN1+)
UNNAMED_9_CAPCERSMDCL2_I111_B: C45.2(B<0>) QZ1.5(OUTN)
UNNAMED_9_CAPCERSMDCL2_I112_B: C46.2(B<0>) QZ1.4(OUTP)
VBIAS+: C3_1_1.2(B<0>) C3_2_1.2(B<0>) C3_3_1.2(B<0>) C3_4_1.2(B<0>) C3_5_1.2(B<0>) C3_6_1.2(B<0>) C3_7_1.2(B<0>) C3_8_1.2(B<0>) C14.2(B<0>) IC2.3(VO) IC2.5(VOSNS) R1_1_1.1(A<0>) R1_2_1.1(A<0>) R1_3_1.1(A<0>) R1_4_1.1(A<0>) R1_5_1.1(A<0>) R1_6_1.1(A<0>) R1_7_1.1(A<0>) R1_8_1.1(A<0>)
VBIAS-: C4_1_1.2(B<0>) C4_2_1.2(B<0>) C4_3_1.2(B<0>) C4_4_1.2(B<0>) C4_5_1.2(B<0>) C4_6_1.2(B<0>) C4_7_1.2(B<0>) C4_8_1.2(B<0>) C12.2(B<0>) IC1.3(VO) IC1.5(VOSNS) R2_1_1.1(A<0>) R2_2_1.1(A<0>) R2_3_1.1(A<0>) R2_4_1.1(A<0>) R2_5_1.1(A<0>) R2_6_1.1(A<0>) R2_7_1.1(A<0>) R2_8_1.1(A<0>)
VREF_BIAS+: IC2.1(REFIN) R7.1(A<0>) R8.2(B<0>)
VREF_BIAS-: IC1.1(REFIN) R6.1(A<0>) R7.2(B<0>)
XA: C45.1(A<0>) IC3.6(XA) J13.2(A<1>)
XB: C46.1(A<0>) IC3.7(XB) J13.3(A<2>)

Pads without a net: IC3 2 9 14 27 30 33; IC4 1; J1 1 12 13 14; J6 1 2 A14 A15 A17 A18 A20 A21 A23 A24 A26 A27 C14 C15 C17 C18 C20 C21 C23 C24 C26 C27; J11 13 14 15 16 17 18 19; JB1 3 5 9 11 80 101 102; JB2 6 30 101 102; JB3 55 56 61 62; QZ1 2; SFP1 NC; SFP2 NC; SFP3 NC; SFP4 NC; U1_1 B3 B6 C7 C8 D7 D8 E9 E10 F3 F7 F8 J3 K7 K8 L9 L10 M9 M10 N3 N8 P8; Z1 3

## Via types
v1: diameter 0.61, hole 0.33, TOP to BOTTOM, 249 vias
v2: diameter 0.914, hole 0.406, TOP to BOTTOM, 221 vias
v3: diameter 0.476, hole 0.2, TOP to BOTTOM, 114 vias

## Routing (per net, layer and track width the routed paths; a pad name or vN(x,y) marks a point on that pad's centre or on a via; arc(x,y) is an arc through that point)
1.5VOUT: length 6.1
  TOP w0.25: LK16.1 121.75,43.7 123.14,43.7 123.73,44.28 124.76,44.28 124.79,44.25 JB2.20
1.8VOUT: length 3.5
  TOP w0.185: LK17.1 92.08,39.05 93.48,39.05 93.68,39.25 JB1.40
3.3VCTREF: length 3.5
  TOP w0.185: LK18.1 100.75,46.4 100.48,46.4 99.84,45.75 JB1.13
3.3VOUT: length 9.3
  TOP w0.25: LK9.1 138.03,46.8 137.98,46.75 JB2.9 JB2.11
DGND: length 5.1
  TOP w0.25: J6.A30 J6.B30 J6.C30
GND_SIGNAL: length 520.6
  TOP w0.13: U1_1.F2 v3(68.1,34.1) ; U1_1.F2 v3(68.1,33.3) U1_1.G3 ; U1_1.F2 v3(67.3,34.1) U1_1.F1 ; v3(70.5,31.7) U1_1.H6 v3(70.5,32.5) ; v3(70.5,31.7) U1_1.H5 ; v3(70.5,31.7) U1_1.J6 v3(70.5,30.9) ; v3(70.5,31.7) U1_1.J5 ; U1_1.F4 v3(68.9,33.3) ; U1_1.F4 v3(69.7,33.3) ; U1_1.F4 v3(69.7,34.1) ; v3(68.9,33.3) U1_1.G4 ; v3(68.9,33.3) U1_1.G3 ; U1_1.A4 69.02,37.98 ; U1_1.A4 v3(69.7,38.1) U1_1.A5 ; U1_1.A4 v3(69.7,37.3) ; U1_1.A4 v3(68.9,37.3) U1_1.B4 ; 69.02,37.98 68.78,37.98 U1_1.A3 v3(68.1,38.1) U1_1.A2 v3(67.3,38.1) U1_1.A1 v3(66.5,38.1) ; 69.02,37.98 v3(68.9,38.1) ; 70.5,38.1 U1_1.A5 ; 70.5,38.1 U1_1.A6 ; 70.5,38.1 v3(70.5,38.4) ; U1_1.A5 v3(69.7,37.3) ; v3(71.3,26.9) U1_1.P7 v3(71.3,27.7) ; v3(69.7,33.3) U1_1.G4 ; v3(69.7,33.3) U1_1.F5 ; v3(69.7,33.3) U1_1.G5 ; U1_1.G5 v3(69.7,32.5) ; U1_1.G5 v3(70.5,32.5) ; U1_1.G5 v3(70.5,33.3) ; v3(69.7,32.5) U1_1.H4 ; v3(69.7,32.5) U1_1.H5 ; v3(69.7,32.5) U1_1.G4 ; U1_1.B7 v3(71.3,37.3) ; v3(71.3,37.3) U1_1.A7 v3(71.3,38.1) U1_1.A6 ; v3(71.3,37.3) U1_1.A6 ; v3(65.67,35.27) 66.11,35.27 66.13,35.3 U1_1.D1 U1_1.D2 v3(68.1,35.7) U1_1.C3 ; 69.82,30.78 v3(69.7,30.9) U1_1.J4 ; 69.82,30.78 U1_1.K5 ; 69.82,30.78 69.82,31.02 U1_1.J5 ; v2(68.9,26.6) 68.5,27 U1_1.P3 ; v3(70.5,33.3) U1_1.G6 v3(70.5,32.5) ; v3(70.5,33.3) U1_1.F6 v3(70.5,34.1) U1_1.E5 ; v3(70.5,33.3) U1_1.F5 ; U1_1.J4 v3(68.9,31.7) ; U1_1.J4 v3(69.7,31.7) ; U1_1.G4 v3(68.9,32.5) ; U1_1.H4 v3(68.9,31.7) ; U1_1.H4 v3(68.9,32.5) ; U1_1.H4 v3(69.7,31.7) ; U1_1.P10 v3(73.7,26.9) U1_1.P9 v3(73.7,27.7) ; U1_1.P10 v3(74.5,26.9) ; U1_1.P10 v3(73.7,27.7) ; U1_1.P10 v3(74.5,27.7) U1_1.N10 v3(73.7,27.7) ; U1_1.A10 73.7,37.3 ; U1_1.A10 73.82,37.98 ; U1_1.A10 v3(74.5,37.3) U1_1.B10 73.7,37.3 ; 73.7,37.3 U1_1.A9 73.58,37.98 73.82,37.98 ; 73.7,37.3 U1_1.B9 ; 73.82,37.98 v3(73.7,38.1) ; v3(70.5,32.5) U1_1.H5 ; U1_1.J2 v3(68.1,31.7) ; U1_1.H3 v3(68.9,32.5) ; U1_1.H3 v3(68.9,31.7) ; U1_1.H3 v3(68.1,32.5) U1_1.G3 ; v3(68.9,32.5) U1_1.G3 ; v3(70.5,30.9) U1_1.K6 v3(70.5,30.1) U1_1.K5 ; v3(70.5,30.9) U1_1.J5 ; v3(70.5,30.9) U1_1.K5 ; v3(68.9,36.5) U1_1.B4 ; v3(68.9,36.5) U1_1.C3 ; v3(68.9,36.5) U1_1.C4 v3(69.7,35.7) U1_1.D5 ; U1_1.B4 v3(69.7,37.3) ; v3(69.7,37.3) U1_1.B5 U1_1.C6 U1_1.D5 ; v3(69.7,30.1) U1_1.K5 ; v2(65.3,30.8) 66.4,30.8 U1_1.J1 ; U1_1.P3 v3(68.1,27.7) U1_1.P2 v3(67.3,26.9) U1_1.P1 v3(66.5,26.9) ; U1_1.P3 v3(68.9,27.7) ; U1_1.F5 v3(69.7,34.1) ; U1_1.E5 U1_1.D5 ; U1_1.E5 v3(69.7,34.1) ; U1_1.J5 v3(69.7,31.7) ; U1_1.C3 v3(68.1,36.5) ; v3(74.89,31.75) 74.8,31.83 74.8,31.9 74.63,32.07 74.13,32.07 U1_1.H10 73.91,32.1 73.88,32.07 73.52,32.07 73.49,32.1 U1_1.H9 ; v3(71.3,27.7) U1_1.N6 v3(70.5,27.7) U1_1.N5 ; v3(71.3,27.7) U1_1.N7 ; v3(69.7,31.7) U1_1.H5 ; v3(73.7,27.7) U1_1.N9 ; v3(68.9,27.7) U1_1.P4 ; v3(68.9,27.7) U1_1.N4 v3(68.9,28.5) U1_1.M4 v3(68.9,29.3) U1_1.M3 v3(68.1,29.3) U1_1.L2 v3(67.3,29.3) U1_1.L1 66.7,29.7 v3(66.4,29.4)
  TOP w0.185: R23.2 76.62,16.36 v1(76.37,16.11)
  TOP w0.23: 64.06,61.45 69.72,66.17 ; 64.06,61.45 69.72,61.45 ; 64.06,61.45 64.06,56.67 ; 64.06,61.45 64.06,66.22 ; 64.06,61.45 58.39,61.45 ; 64.06,61.45 58.39,66.17 ; 64.06,61.45 69.72,56.73 ; 64.06,61.45 58.39,56.73 ; 25.43,84.96 REG3.6 ; REG3.6 36.76,75.52 ; REG3.6 31.1,85.01 ; REG3.6 25.43,80.24 ; REG3.6 31.1,75.46 ; REG3.6 25.43,75.52 ; REG3.6 36.76,80.24 ; REG3.6 36.76,84.96 ; 41.43,75.52 REG2.6 ; REG2.6 52.76,84.96 ; REG2.6 52.76,80.24 ; REG2.6 52.76,75.52 ; REG2.6 41.43,80.24 ; REG2.6 47.1,75.46 ; REG2.6 41.43,84.96 ; REG2.6 47.1,85.01
  TOP w0.25: C7_1.1 v2(65.45,39.3) ; C10_1.1 64.85,25.45 v2(64.6,25.7) ; 107.75,56.31 JB3.12 ; 107.75,56.31 107.84,56.41 107.84,56.51 108.05,56.71 108.15,56.71 v2(108.98,57.54) 109.25,57.81 JB3.17 109.25,60.51 v1(109.23,60.53) ; 107.75,56.31 107.75,56.41 107.47,56.7 107.4,56.7 v2(106.89,57.2) ; IC2.8 39.5,59.79 39.49,59.8 v2(39.49,60.51) ; JB1.1 v1(98.35,49.42) ; C6_8_1.1 v2(38.2,46.1) ; C48.2 v1(133.24,49.86) ; C48.2 v1(131.63,50.93) ; C48.2 v1(135.05,50.93) ; v1(110.7,90.19) U2.4 v1(114.26,90.19) ; v1(125.4,31.75) JB2.70 JB2.69 ; C5_4_1.1 v2(56.2,28.7) ; C5_8_1.1 v2(38.2,48.7) ; v1(98.09,94) U1.1 v1(101.99,94) ; JB3.23 v1(110.75,60.9) ; JB1.25 99.42,42.75 v1(99.63,42.96) ; v1(131.6,44.26) 131.59,44.25 JB2.19 ; J7.20 v1(122.4,86.05) ; J11.5 v1(79.5,89.78) ; JB1.83 v1(97.2,28.25) ; v1(115.54,57.36) 114.7,57.36 114.46,57.12 v2(113.75,57.12) ; v1(115.54,57.36) 116.25,56.65 JB3.46 ; v1(115.54,57.36) 117.03,57.36 117.21,57.54 ; JB3.35 v1(113.75,60.73) ; C4_3_1.1 v2(38.2,14.3) ; C4_5_1.1 v2(38.2,24.3) ; v1(112.52,54.32) 112.25,54.59 JB3.30 v2(112.25,57.59) ; JB1.7 v1(99.54,47.25) ; C3_1_1.1 v2(56.2,50.5) ; 131.74,53.71 v1(130.77,54.68) ; 131.74,53.71 C47.2 ; 131.74,53.71 131.74,56.26 LK2_2.1 ; v1(118,3.09) RZ2.1 RZ2.2 RZ2.3 RZ2.4 v1(118,7.35) ; J8.10 v1(132.22,76.81) ; J8.11 v1(122.4,77.14) ; C3_3_1.1 v2(38.2,20.5) ; JB3.45 116.25,58.3 117.01,57.54 117.21,57.54 ; IC4.3 v1(65.99,95.33) ; IC2.4 39,61 v2(39.49,60.51) ; C4_6_1.1 v2(38.2,34.3) ; v1(114.39,86.38) U2.7 110.64,86.38 v1(110.21,86.81) ; v1(96.37,30.5) 96.37,30.74 96.36,30.75 JB1.74 ; JB1.89 v1(97.14,26.75) ; v1(131.8,41.75) JB2.29 v1(129,41.75) ; C8_1.1 67.15,25.55 v2(67.1,25.6) ; C5_1_1.1 v2(56.2,48.7) ; JB3.5 v2(106.25,58.02) 106.25,57.84 v2(106.89,57.2) ; v2(68.2,39.3) 68.55,39.65 C9_1.1 ; C4_4_1.1 v2(56.2,24.3) ; R16.1 v1(91.11,48.48) ; v2(39.49,60.51) IC2.11 ; C3_4_1.1 v2(56.2,30.5) ; v1(71.1,81.1) 73.1,81.1 v2(73.1,79.5) ; v1(130.88,52.64) 131.74,53.5 C47.2 ; C6_4_1.1 v2(56.2,26.1) ; v1(99.68,30.33) 99.68,30.51 99.44,30.75 JB1.73 ; C4_8_1.1 v2(38.2,44.3) ; J7.11 v1(122.4,94.55) ; JB1.43 v1(99.45,38.25) ; v1(98.15,86.38) U1.7 v1(101.86,86.38) ; v1(78.33,4.9) RZ1.4 RZ1.3 RZ1.2 RZ1.1 v1(73.81,4.9) ; C6_5_1.1 v2(38.2,26.1) ; C3_6_1.1 v2(38.2,40.5) ; J8.20 v1(122.4,68.52) ; v1(98.15,90.19) U1.4 v1(102.12,90.19) ; C47.2 v1(130.83,53.61) ; J7.1 v1(131.99,87.11) ; C5_7_1.1 v2(56.2,38.7) ; v2(112.25,57.59) 112.72,57.12 v2(113.75,57.12) ; v2(112.25,57.59) JB3.29 ; v2(113.75,57.12) JB3.36 ; C6_3_1.1 v2(38.2,16.1) ; v1(96.6,33.2) 96.04,33.2 95.99,33.25 JB1.64 93.49,33.25 v1(93.46,33.22) ; JB1.63 v1(99.64,33.25) ; v1(120.6,88.7) 120.74,88.7 121.15,89.11 J7.17 ; 117.21,57.54 v1(117.77,57.54) ; C5_3_1.1 v2(38.2,18.7) ; v1(99.6,35.75) JB1.53 97.11,35.75 96.96,35.9 v1(96.4,35.9) 95.84,35.9 95.69,35.75 JB1.54 ; JB1.30 v2(96.39,41.75) ; C5_2_1.1 v2(56.2,18.7) ; J8.17 121.19,71.61 120.98,71.4 v1(120.97,71.4) ; C3_7_1.1 v2(56.2,40.5) ; C4_2_1.1 v2(56.2,14.3) ; J11.8 v1(81,89.81) ; JB3.18 v1(109.25,54.34) ; v1(110.23,57.4) 110.75,56.88 JB3.24 ; J8.9 v1(129.12,76) ; J8.14 123.39,74 v1(123.82,74.43) ; R20.1 v1(86.51,48.48) ; v2(106.89,57.2) 107.75,58.05 JB3.11 ; J11.2 v1(78,89.83) ; JB1.33 99.35,40.75 v1(99.62,40.48) ; v2(105.49,53.46) 105.49,53.71 106.25,54.47 ; IC1.8 v2(25,60.5) 24.5,61 IC1.4 ; JB1.19 v1(99.53,44.25) ; J11.11 v1(82.5,89.8) ; C4_1_1.1 v2(56.2,44.3) ; C6_6_1.1 v2(38.2,36.1) ; J8.1 v1(132.35,69.61) ; C3_8_1.1 v2(38.2,50.5) ; J7.10 v1(132.09,94.31) ; C5_5_1.1 v2(38.2,28.7) ; C4_7_1.1 v2(56.2,34.3) ; C6_1_1.1 v2(56.2,46.1) ; C6_7_1.1 v2(56.2,36.1) ; v1(110.79,94) U2.1 v1(114.35,94) ; C3_2_1.1 v2(56.2,20.5) ; C3_5_1.1 v2(38.2,30.5) ; C6_2_1.1 v2(56.2,16.1) ; J7.9 v1(129.21,93.5) ; C5_6_1.1 v2(38.2,38.7) ; J7.14 v1(123.82,91.5)
  TOP w0.3: C18.1 v1(117.5,82.48) ; IC3.24 v3(84,69.5) v3(85,69.5) ; R14.1 v2(80.76,82.93) ; v2(18.13,62.53) Z1.2 v2(19.11,61.51) ; C37.1 91.55,70 91.6,69.95 v2(91.6,69.1) ; IC3.8 v3(87,71.5) v3(86,70.5) IC3.37 ; 84.5,69 v3(85,69.5) ; 84.5,69 IC3.25 ; 84.5,69 v3(84,68.5) IC3.26 ; v3(85,69.5) IC3.37 ; v3(85,69.5) v3(85,68.5) IC3.31 ; C28.1 v2(116.53,79.45) ; 106.85,69.64 106.2,70.29 105.95,70.29 105.3,70.94 105.3,71.07 104.33,72.04 ; 106.85,69.64 C40.1 ; 106.85,69.64 v2(106.85,70.92) ; C16.1 v2(43.5,64.8) ; C17.1 v2(118.4,96.95) ; REG3.3 v2(31.1,91.29) ; v2(25.5,67.2) C7.1 v2(27.1,65.9) ; C29.1 v2(117.5,65.17) ; v2(39,66.8) 39.9,65.9 C8.1 40.1,65.9 v2(41.1,66.9) ; R8.1 v2(38.5,68) ; IC3.37 v3(86,69.5) v3(87,68.5) 87.5,68 IC3.36 ; 36.52,65.9 36,66.42 v2(36,66.7) ; 36.52,65.9 C14.1 ; 36.52,65.9 v2(35.9,65.28) ; C11.1 v2(27.5,64.7) ; 104.33,72.04 104.41,72.04 v2(105.35,72.98) ; 104.33,72.04 QZ1.3 104.08,72.04 v2(103,73.12) ; C12.1 v2(21.5,65.9) ; C15.1 v2(29,64.8) ; C43.1 v2(95.68,67) ; R18.1 v2(87.25,82.93) ; C13.1 v2(42,64.7) ; C3.1 v2(33,96.39) ; C44.1 v2(101.75,65.76) ; C35.1 v2(91,82.54) ; C36.1 v2(86.23,64.55) ; C38.1 v2(88,76.1)
  TOP w1: C6.1 v2(25.55,88.1) ; REG1.3 v1(64.06,72.4) ; C5.1 v2(49,96.35) ; REG2.3 v1(47.1,91.31) ; C4.1 v2(65.96,77.56) ; C1.1 v1(59.18,69.06) ; C2.1 v2(41.57,88.1)
  BOTTOM w0.13: C1_1.1 65.7,35.3 v3(65.67,35.27) ; v3(70.5,38.4) R3_1.1
  BOTTOM w0.25: C21.1 v1(127.37,93) ; C2_1.1 65.8,30.3 v2(65.3,30.8) 65.6,30.8 66.2,31.4 C6_1.1 66.35,32 66,32.35 v3(65.4,32.35) ; C39.1 v1(91.1,64.9) ; v2(68.9,26.6) 68.9,27.36 68.99,27.45 C5_1.1 ; C27.1 v1(126.94,87.43) ; C30.1 v1(126.45,73.38) ; C4_1.1 75.7,33.6 v2(75.8,33.7) 76.25,33.25 C3_1.1 v2(77.05,31.8) ; C31.1 v1(126.51,74.46) ; C26.1 v1(126.3,88.8) ; C32.1 127.16,76 v1(127.18,76.02) ; C34.1 v1(127.45,70) ; C19.1 v1(126.36,90.5) ; C33.1 v1(126.45,71.5) ; C20.1 v1(126.28,91.5)
  vias: v1(92.74,39.94) v2(24,85) v2(24,83) v2(24,81) v2(24,79) v2(24,77) v2(24,75) v2(24,73) v2(24,47.5) v2(24,37.5) v2(24,27.5) v2(24,17.5) v2(34.4,47.4) v2(34.4,37.4) v2(34.4,27.4) v2(34.4,17.4) v2(38,85) v2(38,83) v2(38,81) v2(38,79) v2(38,77) v2(38,75) v2(38,73) v2(42,47.5) v2(42,37.5) v2(42,27.5) v2(42,17.5) v2(52.4,47.4) v2(52.4,37.4) v2(52.4,27.4) v2(52.4,17.4) v2(54,85) v2(54,83) v2(54,81) v2(54,79) v2(54,77) v2(54,75) v2(54,73) v2(56.96,66.21) v2(56.96,64.21) v2(56.96,62.21) v2(56.96,60.21) v2(56.96,58.21) v2(57.03,56.09) v2(57.01,54.02) v2(70.96,66.21) v2(70.96,64.21) v2(70.96,62.21) v2(70.96,60.21) v2(70.96,58.21) v2(71.06,56.2) v2(71.11,54.24) v2(92.9,45.8) v2(136.04,43.91) v3(84,71.5) v3(85,71.5) v3(85,70.5) v3(86,71.5) v3(86,68.5) v3(87,70.5) v3(87,69.5)
